# Allegro board Retro0_card_v0.brd
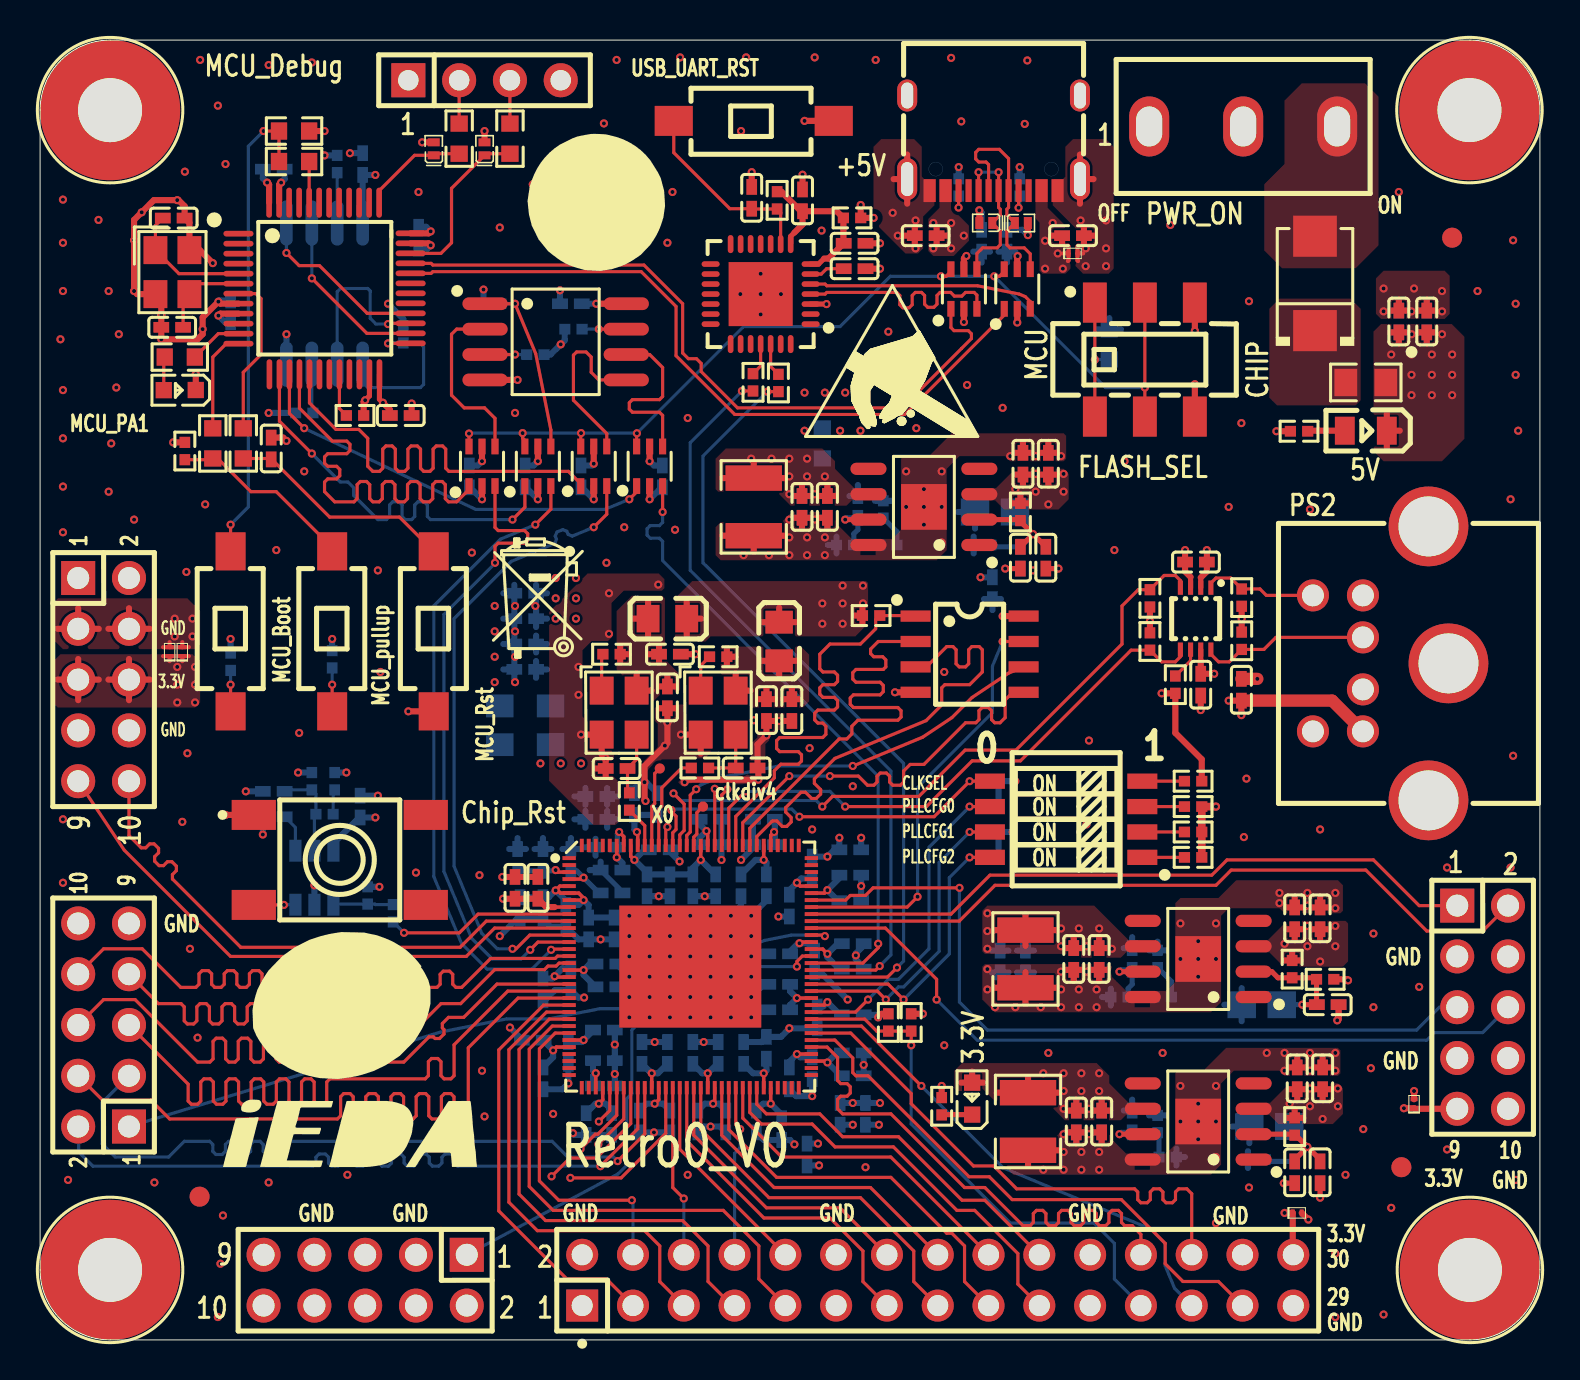
[diagram p0: board, top side]
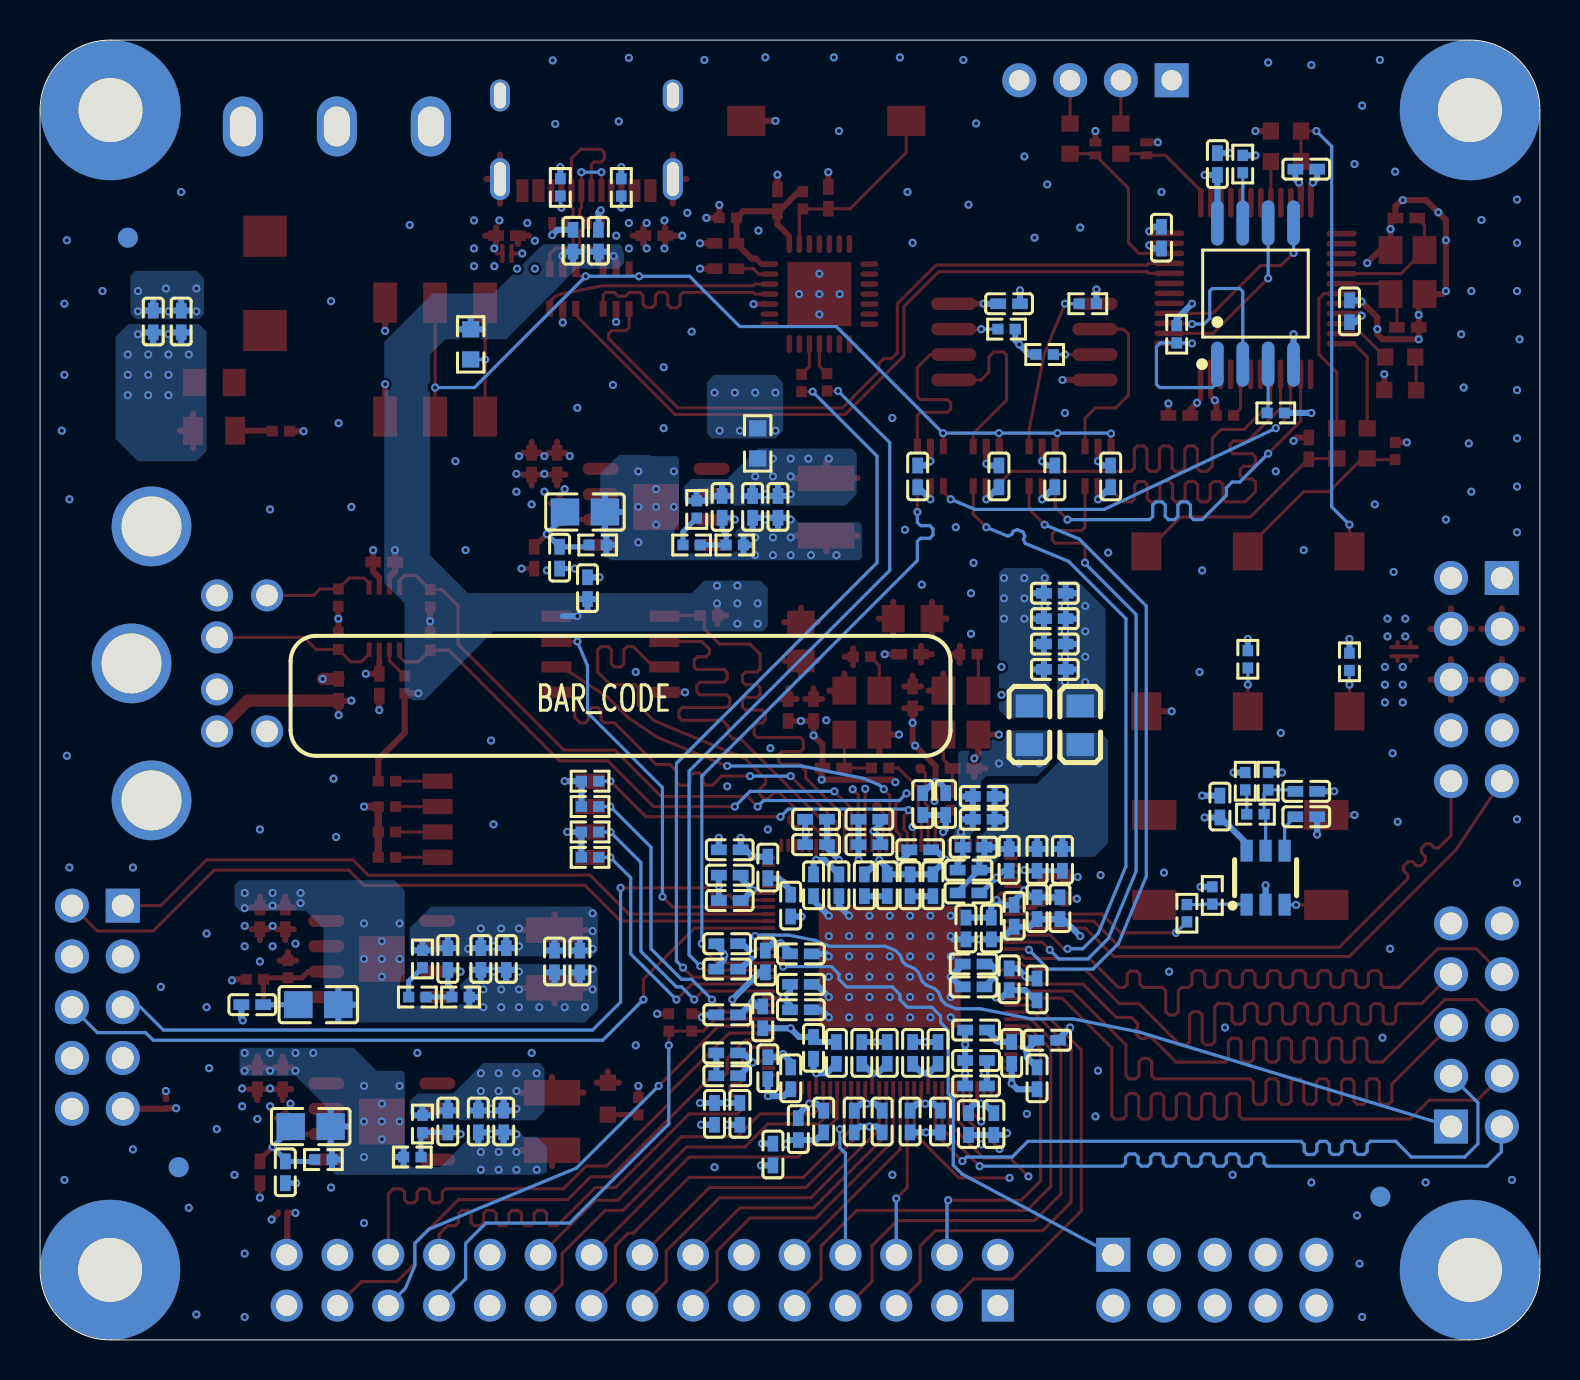
[diagram p1: board, bottom side, seen from below]

Outline 75 x 65 mm; copper layers: TOP, GND02, PWR03, ART04, GND05, BOTTOM. Coordinates in mm from the lower left corner of the outline.
Outline path: 0,61.5 0,3.5 arc(1.03,1.03) 3.5,0 71.5,0 arc(73.98,1.03) 75,3.5 75,61.5 arc(73.98,63.97) 71.5,65 3.5,65 arc(1.03,63.97) 0,61.5

## Design rules (mm)
constraint set DEFAULT: min track width 0.157
net group 3V3_HFP_USB_D: nets 3V3_HFP_USB_DN 3V3_HFP_USB_DP
net group $3N4067: nets $3N4067 EXT_RST_N_I_PAD
net group CUST_I2C: nets CUST_I2C_SCL_IO_PAD CUST_I2C_SDA_IO_PAD
net group CUST_PS2_PS2: nets CUST_PS2_PS2_CLK_I_PAD CUST_PS2_PS2_DAT_I_PAD
net group HFP_SW: nets HFP_SWCLK HFP_SWDIO
net group PS2_5V: nets PS2_CLK_5V PS2_DAT_5V
net group SOC_UD: nets SOC_UD+ SOC_UD-
net group UD: nets UD+ UD-

## Placement (name value [footprint] x y rotation side)
C1  .10  [C0402]  37.59 31.5 270 top
C2  .10  [C0402]  36.32 31.5 270 top
C3  .10  [C0402]  35.33 28.6 0 top
C6  .10  [C0402]  52.96 19.05 90 top
C7  .10  [C0402]  52.96 19.05 90 bottom
C8  .10  [C0402]  51.69 19.05 90 top
C9  .10  [C0402]  51.69 19.05 90 bottom
C10  .10  [C0402]  53.09 10.92 90 bottom
C11  .10  [C0402]  51.82 10.92 90 bottom
C12  .10  [C0402]  53.09 10.92 90 top
C13  .10  [C0402]  51.82 10.92 90 top
C14  .10  [C0402]  62.74 21.08 270 top
C15  .10  [C0402]  64.01 21.08 270 top
C16  .10  [C0402]  62.87 13.08 270 top
C17  .10  [C0402]  64.14 13.08 270 top
C18  .10  [C0402]  51.65 55.22 0 top
C19  .10  [C0402]  69.34 50.93 270 bottom
C20  .10  [C0402]  69.34 50.93 270 top
C21  .10  [C0402]  67.94 50.93 270 top
C22  .10  [C0402]  67.94 50.93 270 bottom
C23  .10  [C0402]  40.73 54.84 0 top
C24  .10  [C0402]  38.13 56.99 90 top
C25  .10  [C0402]  40.73 53.57 0 top
C26  .10  [C0402]  39.37 41.66 90 bottom
C27  .10  [C0402]  39.37 41.66 90 top
C28  .10  [C0402]  38.1 41.66 90 bottom
C29  .10  [C0402]  38.1 41.66 90 top
C30  .10  [C0402]  49.15 43.81 270 top
C31  .10  [C0402]  50.42 43.81 270 top
C32  .10  [C0402]  44.29 55.22 180 top
C33  .10  [C0402]  31.37 32.13 90 top
C34  .10  [C0402]  31.5 34.29 180 top
C35  .10  [C0402]  28.83 28.57 0 top
C48  .10  [C0402]  11.68 26.16 0 bottom
C49  .10  [C0402]  16 26.67 270 bottom
C50  .10  [C0402]  11.68 27.43 0 bottom
C88  .10  [C0402]  18.03 46.23 0 top
C89  .10  [C0402]  6.61 50.64 0 top
C90  .10  [C0402]  6.68 56.1 180 top
C91  .10  [C0402]  18.92 55.12 90 bottom
C93  .10  [C0402]  9.53 51.44 90 bottom
C94  .10  [C0402]  11.68 58.55 0 bottom
C96  .10  [C0402]  11.56 44.58 90 top
C97  .10  [C0402]  16.13 58.8 90 bottom
C102  .10  [C0402]  57.8 38.9 180 top
C103  .10  [C0402]  58.04 32.77 270 top
C115  .10  [C0402]  54.61 19.05 90 bottom
C116  .10  [C0402]  64.39 16.76 0 top
C117  .10  [C0402]  54.61 10.92 90 bottom
C118  .10  [C0402]  62.74 8.38 270 top
C119  .10  [C0402]  40.89 41.66 90 bottom
C120  .10  [C0402]  49.02 39.12 270 bottom
C121  .10  [C0402]  50.29 39.12 270 top
C175  .10  [C0402]  40.01 11.3 90 bottom
C176  .10  [C0402]  41.27 11.3 90 bottom
C177  .10  [C0402]  38.35 9.27 270 bottom
C179  .10  [C0402]  40.64 13.21 180 bottom
C180  .10  [C0402]  36.2 24.77 0 bottom
C181  .10  [C0402]  40.51 23.24 180 bottom
C183  .10  [C0402]  38.86 16.13 90 bottom
C184  .10  [C0402]  35.81 10.92 90 bottom
C185  .10  [C0402]  32.89 10.92 90 bottom
C186  .10  [C0402]  27.3 10.79 90 bottom
C187  .10  [C0402]  33.53 24.77 180 bottom
C188  .10  [C0402]  40.64 18.54 180 bottom
C189  .10  [C0402]  24.64 14.99 0 bottom
C190  .10  [C0402]  31.5 10.92 90 bottom
C192  .10  [C0402]  49.28 18.92 90 bottom
C193  .10  [C0402]  48.01 18.92 90 bottom
C194  .10  [C0402]  40.51 24.51 0 bottom
C195  .10  [C0402]  28.19 12.7 180 bottom
C196  .10  [C0402]  30.1 14.35 270 bottom
C197  .10  [C0402]  25.15 21.59 90 bottom
C198  .10  [C0402]  32.64 22.73 90 bottom
C199  .10  [C0402]  26.29 21.21 90 bottom
C200  .10  [C0402]  26.42 14.35 90 bottom
C201  .10  [C0402]  28.32 18.8 180 bottom
C202  .10  [C0402]  36.32 14.61 270 bottom
C203  .10  [C0402]  27.43 20.57 90 bottom
C204  .10  [C0402]  36.96 19.3 0 bottom
C205  .10  [C0402]  30.99 24.51 180 bottom
C206  .10  [C0402]  36.32 22.73 90 bottom
C247  .10  [C0402]  28.32 24.64 0 bottom
C248  .10  [C0402]  24.26 37.34 0 bottom
C249  .10  [C0402]  25.15 24 270 bottom
C250  .10  [C0402]  26.54 24 270 bottom
C254  .10  [C0402]  60.07 32.51 270 top
C258  .10  [C0402]  48.35 54.97 90 bottom
C259  .10  [C0402]  47.08 54.97 90 bottom
C260  .10  [C0402]  27.05 43.18 270 bottom
C261  .10  [C0402]  21.46 43.18 270 bottom
C264  .10  [C0402]  31.11 43.18 270 bottom
C265  .10  [C0402]  24.26 43.18 270 bottom
C283  .10  [C0402]  64.39 16.76 0 bottom
C285  .10  [C0402]  49.02 39.12 270 top
C286  .10  [C0402]  24.26 34.8 0 bottom
C288  .10  [C0402]  62.74 8.38 270 bottom
C289  .10  [C0402]  64.01 8.38 270 top
C290  .10  [C0805]  61.09 16.76 0 bottom
C291  .10  [C0805]  61.47 10.67 0 bottom
C293  .10  [C0805]  47.75 41.4 0 bottom
C297  .10  [C0402]  37.47 13.08 90 bottom
C300  .10  [C0402]  24.26 33.53 0 bottom
C301  .10  [C0402]  26.54 18.03 90 bottom
C302  .10  [C0402]  24.89 22.61 270 top
C303  .10  [C0402]  29.72 26.8 270 bottom
C315  .10  [C0402]  35.59 57.11 90 top
C317  .10  [C0402]  31.5 22.73 90 bottom
C318  .10  [C0402]  36.96 16.51 0 bottom
C319  .10  [C0402]  35.05 22.73 90 bottom
C320  .10  [C0402]  38.61 23.62 270 bottom
C321  .10  [C0402]  35.18 14.35 270 bottom
C322  .10  [C0402]  33.91 14.35 270 bottom
C323  .10  [C0402]  31.37 14.35 270 bottom
C324  .10  [C0402]  28.19 15.49 180 bottom
C325  .10  [C0402]  28.32 17.65 180 bottom
C326  .10  [C0402]  24 21.59 90 bottom
C327  .10  [C0402]  30.35 22.73 90 bottom
C328  .10  [C0402]  28.7 20.57 90 bottom
C329  .10  [C0402]  33.78 22.73 90 bottom
C339  .10  [C0402]  23.75 22.61 270 top
C340  .10  [C0402]  25.15 13.08 90 bottom
C341  .10  [C0402]  37.08 10.54 90 bottom
C342  .10  [C0402]  36.2 26.04 0 bottom
C343  .10  [C0402]  40.64 19.81 180 bottom
C344  .10  [C0402]  40.51 21.97 180 bottom
C345  .10  [C0402]  25.15 17.53 90 bottom
C346  .10  [C0402]  28.57 10.79 90 bottom
C347  .10  [C0402]  34.29 10.92 90 bottom
C348  .10  [C0402]  26.54 51.82 180 bottom
C349  .10  [C0402]  47.62 37.59 90 bottom
C350  .10  [C0402]  28.19 13.97 180 bottom
C351  .10  [C0402]  38.61 13.59 90 bottom
C352  .10  [C0402]  36.96 17.78 0 bottom
C353  .10  [C0402]  32.64 14.35 270 bottom
C354  .10  [C0402]  38.73 18.92 90 bottom
C355  .10  [C0402]  37.47 21.72 90 bottom
C356  .10  [C0402]  40.64 14.35 180 bottom
C357  .10  [C0402]  33.53 26.04 180 bottom
C358  .10  [C0402]  40.64 16.26 180 bottom
C359  .10  [C0402]  30.86 26.8 270 bottom
C360  .10  [C0402]  29.97 10.92 90 bottom
C361  .10  [C0402]  28.57 22.35 180 bottom
C362  .10  [C0402]  28.57 23.5 0 bottom
C363  .10  [C0402]  27.81 26.04 0 bottom
C364  .10  [C0402]  23.88 24 270 bottom
C365  .10  [C0402]  27.81 27.18 0 bottom
C366  .10  [C0402]  24.26 36.07 0 bottom
D1  .10  [SMB_L4_6-W3_6-LS5_3-RD]  63.75 52.83 90 top
D4  .10  [X1SON-2_L1_0-W0_6-P0_65-RD]  47.29 55.85 180 top
D5  .10  [X1SON-2_L1_0-W0_6-P0_65-RD]  49.07 55.85 0 top
D6  .10  [X2SON-2_L0_6-W0_3-P0_35]  51.65 54.33 0 top
D7  .10  [X1SON-2_L1_0-W0_6-P0_65-RD]  22.23 59.56 90 top
D8  .10  [X1SON-2_L1_0-W0_6-P0_65-RD]  19.68 59.56 90 top
D9  .10  [X2SON-2_L0_6-W0_3-P0_35]  62.87 6.35 0 top
D10  .10  [X2SON-2_L0_6-W0_3-P0_35]  6.48 34.42 90 top
D11  .10  [X2SON-2_L0_6-W0_3-P0_35]  68.71 11.81 90 top
D12  .10  [X2SON-2_L0_6-W0_3-P0_35]  7.11 34.42 90 top
F1  .10  [R0805]  66.29 47.88 0 top
H1  -  [HDR-TH_4P-P2_54-V-F]  22.23 62.99 0 top
H55  -  [HDR-TH_30P-P2_54-V-M-R2-C15-S2_54-BL]  44.89 2.99 0 top
L1  .10  [L0805]  36.96 34.92 270 top
L2  .10  [L0805]  31.37 36.07 180 top
L13  .10  [L0805]  25.53 30.73 270 bottom
L14  .10  [L0805]  22.99 30.73 270 bottom
LED1  .10  [LED0603-RD]  46.61 12.06 90 top
LED4  .10  [LED0603-RD-YELLOW]  6.99 47.5 180 top
LED15  .10  [LED0805-R-RD]  66.29 45.47 180 top
MARK1  -  [MARK-POINT-1MM]  7.98 7.16 0 top
MARK2  -  [MARK-POINT-1MM]  70.61 55.12 0 top
MARK3  -  [MARK-POINT-1MM]  68.07 8.64 0 top
MARK4  -  [MARK-POINT-1MM]  7.98 7.16 180 bottom
MARK5  -  [MARK-POINT-1MM]  70.61 55.12 180 bottom
MARK6  -  [MARK-POINT-1MM]  68.07 8.64 180 bottom
NOREF  -  []  23.62 -4.45 0 top
NOREF#2  -  []  49.86 -22.25 0 top
NOREF#3  -  []  0 61.5 0 top
NOREF#4  -  []  42.42 48.26 0 top
NOREF#5  -  []  271.12 -27.46 0 top
NOREF#6  -  []  131.83 -24.38 0 top
NOREF#7  -  []  27.43 37.21 0 top
NOREF#8  -  []  14.48 10.29 0 top
NOREF#9  -  []  24.38 53.47 0 top
NOREF#10  -  []  3.5 0 90 top
NOREF#11  -  []  14.99 16.76 0 top
NOREF#12  -  []  46.48 32.13 0 bottom
OSC1  -  [OSC-SMD_4P-L3_2-W2_5-BL]  28.96 31.37 270 top
PS1  -  [CONN-TH_DS1093-01-PN60]  67.04 33.83 90 top
R1  .10  [R0402]  33.91 34.16 180 top
R2  .10  [R0402]  32.99 28.6 180 top
R3  .10  [R0402]  29.46 26.92 270 top
R4  .10  [R0402]  28.57 34.29 180 top
R7  .10  [R0402]  60.83 9.02 180 bottom
R8  .10  [R0402]  55.88 10.79 270 bottom
R9  .10  [R0402]  64.26 18.03 0 top
R10  .10  [R0402]  62.74 10.67 270 top
R12  .10  [R0402]  53.98 17.14 180 bottom
R13  .10  [R0402]  56.39 9.14 0 bottom
R14  .10  [R0402]  36.92 47.85 270 top
R15  .10  [R0402]  35.65 47.89 270 top
R16  .10  [R0402]  47.12 39.75 180 bottom
R17  .10  [R0402]  42.42 39.75 180 bottom
R18  .10  [R0402]  45.94 57.63 90 bottom
R19  .10  [R0402]  49.02 41.4 270 top
R20  .10  [R0402]  40.26 39.75 180 bottom
R21  .10  [R0402]  48.99 57.63 90 bottom
R22  .10  [R0402]  45.09 11.68 270 top
R23  .10  [R1210]  49.28 19.05 90 top
R24  .10  [R0402]  40.6 56.11 180 top
R25  .10  [R0402]  36.86 56.99 270 top
R26  .10  [R0402]  57.66 24.13 0 top
R27  .10  [R0402]  57.66 25.4 0 top
R29  .10  [R0402]  57.66 26.67 0 top
R30  .10  [R0402]  57.66 27.94 0 top
R37  .10  [R0402]  14.73 27.94 270 bottom
R38  .10  [R0402]  16.38 22.23 90 bottom
R39  .10  [R0402]  13.59 27.94 90 bottom
R40  .10  [R0402]  17.65 21.34 90 bottom
R153  .10  [R0603]  6.99 49.15 0 top
R154  .10  [R0402]  15.75 46.23 180 top
R157  .10  [R0603]  12.7 60.45 180 top
R158  .10  [R0603]  8.64 44.83 90 top
R160  .10  [R0603]  53.47 49.78 270 bottom
R168  .10  [R0402]  56.77 32.77 90 top
R182  .10  [R0402]  56.13 17.14 180 bottom
R183  .10  [R0402]  55.88 19.05 90 bottom
R184  .10  [R0402]  62.61 18.54 270 top
R185  .10  [R0402]  42.16 41.53 90 bottom
R191  .10  [R1210]  49.4 10.92 90 top
R193  .10  [R1210]  35.69 41.66 90 top
R230  .10  [R0402]  47.5 24.13 0 bottom
R231  .10  [R0402]  47.5 25.4 0 bottom
R232  .10  [R0402]  47.5 26.67 0 bottom
R233  .10  [R0402]  47.5 27.94 0 bottom
R234  .10  [R0402]  62.96 45.44 0 top
R245  .10  [R0402]  13.21 46.35 0 bottom
R246  .10  [R0402]  14.86 58.8 90 bottom
R247  .10  [R0603]  20.95 60.07 90 top
R248  .10  [R0603]  10.16 44.83 270 top
R249  .10  [R0603]  23.5 60.07 90 top
R250  .10  [R0603]  12.7 58.93 180 top
R252  .10  [R0402]  9.53 33.91 90 bottom
R253  .10  [R0402]  14.61 34.04 90 bottom
R287  .10  [R0402]  42.42 15.88 270 top
R334  .10  [R0603]  39.12 44.83 90 bottom
R335  .10  [R0402]  55.5 37.08 90 top
R336  .10  [R0402]  55.5 34.92 270 top
R337  .10  [R0402]  60.09 37.12 270 top
R338  .10  [R0402]  60.09 34.96 90 top
R351  .10  [R0402]  18.16 50.29 270 bottom
R354  .10  [R0402]  7.24 44.45 90 top
R357  .10  [R0402]  24.77 49.28 180 bottom
R358  .10  [R0402]  26.67 50.55 180 bottom
R359  .10  [R0402]  22.61 51.82 0 bottom
R362  .10  [R0402]  41.56 36.22 0 top
R363  .10  [R0402]  14.22 26.29 0 bottom
R364  .10  [R0402]  43.56 15.88 270 top
SCREW1  -  [M3__]  3.5 61.5 0 top
SCREW2  -  [M3__]  71.48 61.5 0 top
SCREW3  -  [M3__]  71.5 3.5 0 top
SCREW4  -  [M3__]  3.5 3.5 0 top
SW3  -  [KEY-SMD_4P-L6_0-W6_0-P4_50-LS8_5]  14.99 24 0 top
SW9  -  [SW-TH_SS-12D10L5]  60.16 60.68 0 top
SW14  .10  [SW-SMD_L6_0-W3_3-LS8_0]  9.53 35.43 270 top
SW15  .10  [SW-SMD_L6_0-W3_3-LS8_0]  19.68 35.43 270 top
SW16  .10  [SW-SMD_L6_0-W3_3-LS8_0]  14.61 35.43 270 top
SW17  -  [SW-SMD_MST22D18G2]  55.24 49.02 0 top
SW22  .10  [SW-SMD_L6_0-W3_3-LS8_0]  35.69 60.96 0 top
SW23  -  [SW-SMD_8P-L6_7-W5_4-P1_27-LS8_5]  51.31 26.04 90 top
TP1  -  [TEST-POINT-0_5MM]  33.15 26.67 0 top
TP2  -  [TEST-POINT-0_5MM]  30.99 28.57 0 top
U2  -  [VSON8_L2_0-W2_3-P0_50-LS3_1-BL]  57.78 36.07 180 top
U3  -  [SOT-23-6_L2_9-W1_6-P0_95-LS2_8-BR]  13.72 23.11 270 bottom
U7  -  [SOP-8_L4_9-W3_9-P1_27-LS6_0-BL-EP]  57.91 19.05 90 top
U8  -  [SOP-8_L4_9-W3_9-P1_27-LS6_0-BL-EP]  57.91 10.92 90 top
U9  -  [WQFN-28_L5_0-W5_0-P0_50-BL-EP3_2]  36.03 52.3 90 top
U10  -  [SOP-8_L4_9-W3_9-P1_27-LS6_0-BL-EP]  44.2 41.66 90 top
U17  -  [LQFP-48_48P-L7_0-W7_0-P0_50-LS9_0-BL]  14.22 52.58 270 top
U18  -  [SOIC-8_L5_3-W5_3-P1_27-LS8_0-BL]  14.22 52.32 180 bottom
U19  -  [SOT-363_L2_0-W1_3-P0_65-LS2_1-BL]  24.89 43.69 0 top
U20  -  [SOT-363_L2_0-W1_3-P0_65-LS2_1-BL]  30.48 43.69 0 top
U21  -  [SOT-363_L2_0-W1_3-P0_65-LS2_1-BL]  22.1 43.69 0 top
U22  -  [SOT-363_L2_0-W1_3-P0_65-LS2_1-BL]  27.69 43.69 0 top
U24  -  [SOT-363_L2_0-W1_3-P0_65-LS2_1-BL]  46.2 52.55 0 top
U25  -  [SOT-363_L2_0-W1_3-P0_65-LS2_1-BL]  48.86 52.55 0 top
U43  -  [QFN-128_L12_3-W12_3-P0_35-TL-EP7_0-1]  32.51 18.67 0 top
U46  -  [HDR-TH_10P-P2_54-V-M-R2-C5-S2_54]  3.17 33.02 270 top
U54  -  [SOIC-8_L5_3-W5_3-P1_27-LS8_0-BL]  25.78 49.91 270 top
U56  -  [SOP-8_L4_9-W3_9-P1_27-LS6_0-BL-2]  46.48 34.29 270 top
U57  -  [HDR-TH_10P-P2_54-V-M-R2-C5-S2_54]  16.26 2.99 180 top
U58  -  [HDR-TH_10P-P2_54-V-M-R2-C5-S2_54]  72.14 16.64 270 top
U59  -  [HDR-TH_10P-P2_54-V-M-R2-C5-S2_54]  3.17 15.75 90 top
UART1  -  [USB-C-SMD_G-SWITCH_GT-USB-7010EN]  47.68 59.85 180 top
X1  -  [OSC-SMD_4P-L3_2-W2_5-BL1]  33.91 31.37 270 top
X2  -  [CRYSTAL-SMD_4P-L3_2-W2_5-BL]  6.62 53.4 270 top

## Library data of the parts
C1 C2 C6 C7 C10 C11 C21 C22 C26 C27 C33 C34 C116 C118 C179-C181 C195-C197 C248 C249 C283 C288 C289 C355 = CL05B104KB54PNC
C3 C35 = GJM1555C1H150FB01D
C8 C9 C12 C13 C15 C17-C20 C28 C29 C31 C32 C121 C175-C177 C192-C194 C300 C317-C329 C339-C347 C350-C352 C356-C362 C364-C366 = HGC0402R5106M100NTEJ
C14 C16 C23 C30 C247 = CL05A105KA5NQNC
C24 C25 C49 C88 C91 C93 C94 = CC0402KRX7R7BB104
C48 = GRM155R71H223KA12D
C50 = CC0402KRX7R9BB103
C89 C90 = GRM1555C1H120JA01D
C96 C97 C102 C103 C254 C258-C261 C264 C265 C315 C348 C349 = CL05B104KO5NNNC
C115 C117 C119 = GRM1555C1H102JA01D
C120 C285 = GRM155R71H104KE14D
C183-C186 C198-C201 C250 C286 C353 C363 = GRM155C61E475ME15D
C187 C188 C202 C203 = GRT155R6YA105KE13D
C189 C190 C204-C206 C301 C302 C354 = GCM1555G1H102JA16D
C290 C291 = CL21A106KAYNNNE_C15850
C293 = GRM21BR61H106KE43L
C297 C303 = GRM155R61H474KE11D
D1 = VS-20BQ030-M3_5BT
D4 D5 D7 D8 = ESD321DPYR_C2868952
D6 D9-D12 = ESD441DPLR
F1 = SMD0805-100-12
H1 = 2_54-1_4P_
H55 = X6521WV-2X15H-C60D30
L1 L2 L13 L14 = CBW201209U601T
LED1 = KT-0603R
LED4 = 19-213_Y2C-CQ2R2L_3T_CY_
LED15 = NCD0805R1
MARK1-MARK6 = MARK-POINT
OSC1 = OT2EL4C4JI-111OLP-12_288M
PS1 = DS1093-01-PN60
R1 R4 R22 R25 R168 R234 R245 R246 R335-R338 R351 R354 R357-R359 R362 R364 = 0402WGF4701TCE
R2 R3 = 0402WGF330JTCE
R7 R9 R16 = RC0402FR-071KL
R8 R17 = RC0402FR-0756KL
R10 R19 R184 = RC0402FR-072K49L
R12 R13 R20 R38 R39 R154 R182 R230-R233 = 0402WGF1002TCE
R14 R15 R24 = 0402WGF0000TCE
R18 R21 = 0402WGF5101TCE
R23 R191 R193 = RC1210FR-07100RL
R26 R27 R29 R30 = 0402WGF1500TCE
R37 = RC0402FR-0757K6P
R40 = 0402WGF0000TCE: signal model: 0402WGF0000TCE_.10
R153 R160 = 0603WAF4701T5E
R157 = 0603WAF1002T5E
R158 = 0603WAF3300T5E
R183 = 0402WGF4021TCE
R185 = RC0402FR-070RL
R247-R250 R334 = 0603WAF0000T5E
R252 R253 R287 = 0402WGF1001TCE
R363 = RT0402BRD0720KL
SCREW1-SCREW4 = M3__
SW3 = TS-KG02S-AT50F
SW9 = SS-12D10L5
SW14-SW16 SW22 = TS-1101-C-W
SW17 = MST22D18G2_125
SW23 = DSHP04TS-S
TP1 TP2 = TEST-POINT
U2 = TXS0102DCUR
U3 = TPS3808G01DBVR
U7 U8 U10 = RT2515HGSP
U9 = CP2102-GMR
U17 = CH32V103C8T6
U18 U54 = W25Q128JVSIQ_C113767
U19-U22 U24 U25 = WAS3157B-6_TR
U43 = RETRO0
U46 U57-U59 = ZX-PZ2_54-2-5PZZ
U56 = ESP-PSRAM64H
UART1 = HC-TYPE-C-16P-01A-R
X1 = OT2EL4C4JI-111OLP-24M
X2 = X32258MOB4SI

## Footprints (pads in the part's own frame, mm; a bottom-side part is the same pattern mirrored in y, then rotated)
C0402
  rect 0.787x0.533 smd: 1(-0.545,0) 2(0.545,0)
C0805
  rect 1.422x1.346 smd: 1(-1,0) 2(1,0)
CONN-TH_DS1093-01-PN60
  round 1.6 hole 1.092: 1(1.301,0.888) 2(-1.3,0.888) 3(3.4,0.888) 4(-3.4,0.888) 5(3.4,3.388) 6(-3.4,3.388)
  round 3.988 hole 2.997: 7(0,-3.388) 8(-6.85,-2.39) 9(6.85,-2.39)
CRYSTAL-SMD_4P-L3_2-W2_5-BL
  rect 1.397x1.194 smd: 1(-1.1,-0.85) 2(1.1,-0.85) 3(1.1,0.85) 4(-1.1,0.85)
HDR-TH_4P-P2_54-V-F
  rect 1.702x1.702 hole 1.02: 1(-3.81,0)
  round 1.702 hole 1.02: 2(-1.27,0) 3(1.27,0) 4(3.81,0)
HDR-TH_10P-P2_54-V-M-R2-C5-S2_54
  rect 1.7x1.7 hole 1.1: 1(-5.08,-1.27)
  round 1.7 hole 1.1: 2(-5.08,1.27) 3(-2.54,-1.27) 4(-2.54,1.27) 5(0,-1.27) 6(0,1.27) 7(2.54,-1.27) 8(2.54,1.27) 9(5.08,-1.27) 10(5.08,1.27)
HDR-TH_30P-P2_54-V-M-R2-C15-S2_54-BL
  rect 1.6x1.6 hole 1.05: 1(-17.78,-1.27)
  round 1.6 hole 1.05: 2(-17.78,1.27) 3(-15.24,-1.27) 4(-15.24,1.27) 5(-12.7,-1.27) 6(-12.7,1.27) 7(-10.16,-1.27) 8(-10.16,1.27) 9(-7.62,-1.27) 10(-7.62,1.27) 11(-5.08,-1.27) 12(-5.08,1.27) 13(-2.54,-1.27) 14(-2.54,1.27) 15(0,-1.27) 16(0,1.27) 17(2.54,-1.27) 18(2.54,1.27) 19(5.08,-1.27) 20(5.08,1.27) 21(7.62,-1.27) 22(7.62,1.27) 23(10.16,-1.27) 24(10.16,1.27) 25(12.7,-1.27) 26(12.7,1.27) 27(15.24,-1.27) 28(15.24,1.27) 29(17.78,-1.27) 30(17.78,1.27)
KEY-SMD_4P-L6_0-W6_0-P4_50-LS8_5
  rect 2.21x1.499 smd: 1(-4.3,2.25) 2(4.3,2.25) 3(-4.3,-2.25) 4(4.3,-2.25)
L0805
  rect 1.143x1.372 smd: 1(-0.966,0) 2(0.966,0)
LED0603-RD
  rect 0.813x0.813 smd: 1(-0.8,0) 2(0.8,0)
LED0603-RD-YELLOW
  rect 0.813x0.813 smd: 1(-0.8,-0.004) 2(0.8,0.004)
LED0805-R-RD
  rect 0.991x1.397 smd: 1(1.05,0) 2(-1.05,0)
LQFP-48_48P-L7_0-W7_0-P0_50-LS9_0-BL
  oval 0.279x1.499 smd: 1(-2.743,-4.305) 2(-2.243,-4.305) 3(-1.742,-4.305) 4(-1.242,-4.305) 5(-0.742,-4.305) 6(-0.241,-4.305) 7(0.257,-4.305) 8(0.757,-4.305) 9(1.257,-4.305) 10(1.758,-4.305) 11(2.258,-4.305) 12(2.758,-4.305) 25(2.743,4.305) 26(2.243,4.305) 27(1.742,4.305) 28(1.242,4.305) 29(0.742,4.305) 30(0.241,4.305) 31(-0.257,4.305) 32(-0.757,4.305) 33(-1.257,4.305) 34(-1.758,4.305) 35(-2.258,4.305) 36(-2.758,4.305)
  oval 1.499x0.279 smd: 13(4.293,-2.756) 14(4.293,-2.256) 15(4.293,-1.755) 16(4.293,-1.255) 17(4.293,-0.754) 18(4.293,-0.254) 19(4.293,0.244) 20(4.293,0.744) 21(4.293,1.245) 22(4.293,1.745) 23(4.293,2.245) 24(4.293,2.746) 37(-4.293,2.731) 38(-4.293,2.23) 39(-4.293,1.73) 40(-4.293,1.229) 41(-4.293,0.729) 42(-4.293,0.229) 43(-4.293,-0.269) 44(-4.293,-0.77) 45(-4.293,-1.27) 46(-4.293,-1.77) 47(-4.293,-2.271) 48(-4.293,-2.771)
M3__
  round 7.01 hole 3.2: 1(0,0)
MARK-POINT-1MM
  round 1 smd: 1(0,0)
OSC-SMD_4P-L3_2-W2_5-BL
  rect 1.397x1.194 smd: 1(-1.1,-0.875) 2(1.1,-0.875) 3(1.1,0.875) 4(-1.1,0.875)
OSC-SMD_4P-L3_2-W2_5-BL1
  rect 1.397x1.194 smd: 1(-1.1,-0.875) 2(1.1,-0.875) 3(1.1,0.875) 4(-1.1,0.875)
QFN-128_L12_3-W12_3-P0_35-TL-EP7_0-1
  rect 0.665x0.196 smd: 1(-6.057,5.425) 2(-6.057,5.075) 3(-6.057,4.725) 4(-6.057,4.375) 5(-6.057,4.025) 6(-6.057,3.675) 7(-6.057,3.325) 8(-6.057,2.975) 9(-6.057,2.625) 10(-6.057,2.275) 11(-6.057,1.925) 12(-6.057,1.575) 13(-6.057,1.225) 14(-6.057,0.875) 15(-6.057,0.525) 16(-6.057,0.175) 17(-6.057,-0.175) 18(-6.057,-0.525) 19(-6.057,-0.875) 20(-6.057,-1.225) 21(-6.057,-1.575) 22(-6.057,-1.925) 23(-6.057,-2.275) 24(-6.057,-2.625) 25(-6.057,-2.975) 26(-6.057,-3.325) 27(-6.057,-3.675) 28(-6.057,-4.025) 29(-6.057,-4.375) 30(-6.057,-4.725) 31(-6.057,-5.075) 32(-6.057,-5.425) 65(6.058,-5.425) 66(6.058,-5.075) 67(6.058,-4.725) 68(6.058,-4.375) 69(6.058,-4.025) 70(6.058,-3.675) 71(6.058,-3.325) 72(6.058,-2.975) 73(6.058,-2.625) 74(6.058,-2.275) 75(6.058,-1.925) 76(6.058,-1.575) 77(6.058,-1.225) 78(6.058,-0.875) 79(6.058,-0.525) 80(6.058,-0.175) 81(6.058,0.175) 82(6.058,0.525) 83(6.058,0.875) 84(6.058,1.225) 85(6.058,1.575) 86(6.058,1.925) 87(6.058,2.275) 88(6.058,2.625) 89(6.058,2.975) 90(6.058,3.325) 91(6.058,3.675) 92(6.058,4.025) 93(6.058,4.375) 94(6.058,4.725) 95(6.058,5.075) 96(6.058,5.425)
  rect 0.196x0.665 smd: 33(-5.425,-6.057) 34(-5.075,-6.057) 35(-4.725,-6.057) 36(-4.375,-6.057) 37(-4.025,-6.057) 38(-3.675,-6.057) 39(-3.325,-6.057) 40(-2.975,-6.057) 41(-2.625,-6.057) 42(-2.275,-6.057) 43(-1.925,-6.057) 44(-1.575,-6.057) 45(-1.225,-6.057) 46(-0.875,-6.057) 47(-0.525,-6.057) 48(-0.175,-6.057) 49(0.175,-6.057) 50(0.525,-6.057) 51(0.875,-6.057) 52(1.225,-6.057) 53(1.575,-6.057) 54(1.925,-6.057) 55(2.275,-6.057) 56(2.625,-6.057) 57(2.975,-6.057) 58(3.325,-6.057) 59(3.675,-6.057) 60(4.025,-6.057) 61(4.375,-6.057) 62(4.725,-6.057) 63(5.075,-6.057) 64(5.425,-6.057) 97(5.425,6.057) 98(5.075,6.057) 99(4.725,6.057) 100(4.375,6.057) 101(4.025,6.057) 102(3.675,6.057) 103(3.325,6.057) 104(2.975,6.057) 105(2.625,6.057) 106(2.275,6.057) 107(1.925,6.057) 108(1.575,6.057) 109(1.225,6.057) 110(0.875,6.057) 111(0.525,6.057) 112(0.175,6.057) 113(-0.175,6.057) 114(-0.525,6.057) 115(-0.875,6.057) 116(-1.225,6.057) 117(-1.575,6.057) 118(-1.925,6.057) 119(-2.275,6.057) 120(-2.625,6.057) 121(-2.975,6.057) 122(-3.325,6.057) 123(-3.675,6.057) 124(-4.025,6.057) 125(-4.375,6.057) 126(-4.725,6.057) 127(-5.075,6.057) 128(-5.425,6.057)
  rect 7.1x6.1 smd: 129(0,0)
R0402
  rect 0.559x0.533 smd: 1(-0.433,0) 2(0.433,0)
R0603
  rect 0.813x0.864 smd: 1(-0.753,0) 2(0.753,0)
R0805
  rect 1.143x1.372 smd: 1(-1,0) 2(1,0)
R1210
  rect 1.27x2.819 smd: 1(-1.441,0) 2(1.441,0)
SMB_L4_6-W3_6-LS5_3-RD
  rect 2.057x2.184 smd: 1(-2.361,0) 2(2.361,0)
SOIC-8_L5_3-W5_3-P1_27-LS8_0-BL
  oval 0.635x2.261 smd: 1(-1.905,-3.53) 2(-0.635,-3.53) 3(0.635,-3.53) 4(1.905,-3.53) 5(1.905,3.53) 6(0.635,3.53) 7(-0.635,3.53) 8(-1.905,3.53)
SOP-8_L4_9-W3_9-P1_27-LS6_0-BL-2
  rect 0.56x1.5 smd: 1(-1.905,-2.701) 2(-0.635,-2.701) 3(0.635,-2.701) 4(1.905,-2.7) 5(1.905,2.7) 6(0.635,2.7) 7(-0.635,2.7) 8(-1.905,2.7)
SOP-8_L4_9-W3_9-P1_27-LS6_0-BL-EP
  oval 0.61x1.803 smd: 1(-1.905,-2.772) 2(-0.635,-2.772) 3(0.635,-2.772) 4(1.905,-2.772) 5(1.905,2.772) 6(0.635,2.772) 7(-0.635,2.772) 8(-1.905,2.772)
  rect 2.286x2.286 smd: 9(0,0)
SOT-23-6_L2_9-W1_6-P0_95-LS2_8-BR
  rect 1.092x0.61 smd: 1(1.35,-0.95) 2(1.35,0) 3(1.35,0.95) 4(-1.35,0.95) 5(-1.35,0) 6(-1.35,-0.95)
SOT-363_L2_0-W1_3-P0_65-LS2_1-BL
  rect 0.356x0.787 smd: 1(-0.65,-0.99) 2(0,-0.99) 3(0.65,-0.99) 4(0.65,0.99) 5(0,0.99) 6(-0.65,0.99)
SW-SMD_8P-L6_7-W5_4-P1_27-LS8_5
  rect 0.762x1.499 smd: 1(-1.905,-3.81) 2(-0.635,-3.81) 3(0.635,-3.81) 4(1.905,-3.81) 5(1.905,3.81) 6(0.635,3.81) 7(-0.635,3.81) 8(-1.905,3.81)
SW-SMD_L6_0-W3_3-LS8_0
  rect 1.905x1.499 smd: 1(-4,0) 2(4,0)
SW-SMD_MST22D18G2
  rect 1.194x2.007 smd: 1(-2.5,2.85) 2(0,2.85) 3(2.5,2.85) 4(-2.5,-2.85) 5(0,-2.85) 6(2.5,-2.85)
SW-TH_SS-12D10L5
  oval 2x3 hole 1.3x2: 1(-4.7,0) 2(0,0) 3(4.7,0)
TEST-POINT-0_5MM
  round 0.508 smd: 1(0,0)
USB-C-SMD_G-SWITCH_GT-USB-7010EN
  oval 1x2.1 hole 0.6x1.7: 1(-4.32,1.803) 2(4.32,1.803)
  oval 1x1.6 hole 0.6x1.3: 3(4.32,-2.378) 4(-4.32,-2.378)
  rect 0.61x1.143 smd: A1B12(-3.2,2.378) A4B9(-2.4,2.378) B1A12(3.2,2.378) B4A9(2.4,2.378)
  rect 0.305x1.143 smd: A5(-1.25,2.378) A6(-0.25,2.378) A7(0.25,2.378) A8(1.25,2.378) B5(1.75,2.378) B6(0.75,2.378) B7(-0.75,2.378) B8(-1.75,2.378)
VSON8_L2_0-W2_3-P0_50-LS3_1-BL
  rect 0.254x0.711 smd: 1(-0.762,-1.55) 2(-0.254,-1.55) 3(0.254,-1.55) 4(0.762,-1.55) 5(0.762,1.55) 6(0.254,1.55) 7(-0.254,1.55) 8(-0.762,1.55)
WQFN-28_L5_0-W5_0-P0_50-BL-EP3_2
  oval 0.28x0.9 smd: 1(-1.501,-2.5) 2(-1.001,-2.5) 3(-0.5,-2.5) 4(0,-2.5) 5(0.5,-2.5) 6(1.001,-2.5) 7(1.501,-2.5) 15(1.501,2.5) 16(1.001,2.5) 17(0.5,2.5) 18(0,2.5) 19(-0.5,2.5) 20(-1.001,2.5) 21(-1.501,2.5)
  oval 0.9x0.28 smd: 8(2.5,-1.501) 9(2.5,-1.001) 10(2.5,-0.5) 11(2.5,0) 12(2.5,0.5) 13(2.5,1.001) 14(2.5,1.501) 22(-2.5,1.501) 23(-2.5,1.001) 24(-2.5,0.5) 25(-2.5,0) 26(-2.5,-0.5) 27(-2.5,-1.001) 28(-2.5,-1.501)
  rect 3.2x3.2 smd: 29(0,0)
X1SON-2_L1_0-W0_6-P0_65-RD
  rect 0.4x0.6 smd: 1(-0.325,0) 2(0.325,0)
X2SON-2_L0_6-W0_3-P0_35
  rect 0.2x0.35 smd: 1(-0.225,0) 2(0.225,0)

## Nets
3V3_HFP_SPI1_CLK: U17.15 U20.1
3V3_HFP_SPI1_CS: U17.14 U19.1
3V3_HFP_SPI1_MISO: U17.16 U21.1
3V3_HFP_SPI1_MOSI: U17.17 U22.1
3V3_HFP_SPI2_CLK: U17.26 U18.6
3V3_HFP_SPI2_CS: R351.2 U17.25 U18.1
3V3_HFP_SPI2_MISO: U17.27 U18.2
3V3_HFP_SPI2_MOSI: U17.28 U18.5
3V3_HFP_USB_DN: U17.32 U25.1
3V3_HFP_USB_DP: U17.33 U24.1
GND: C1.2 C2.2 C3.2 C6.1 C7.1 C8.1 C9.1 C10.1 C11.1 C12.1 C13.1 C14.1 C15.1 C16.1 C17.1 C18.2 C19.1 C20.1 C21.1 C22.1 C23.2 C24.2 C25.2 C26.1 C27.1 C28.1 C29.1 C30.1 C31.1 C32.2 C33.1 C34.1 C35.1 C48.1 C49.1 C50.1 C88.2 C89.1 C90.1 C91.1 C93.2 C94.2 C96.2 C97.2 C102.1 C103.2 C116.2 C118.2 C120.2 C121.2 C175.1 C176.1 C177.1 C179.1 C180.1 C181.1 C183.1 C184.1 C185.1 C186.1 C187.1 C188.1 C189.1 C190.1 C192.1 C193.1 C194.1 C195.1 C196.1 C197.1 C198.1 C199.1 C200.1 C201.1 C202.1 C203.1 C204.1 C205.1 C206.1 C248.1 C254.1 C258.2 C259.2 C260.2 C261.2 C264.2 C265.2 C283.2 C285.2 C286.1 C288.2 C289.2 C290.1 C291.1 C293.1 C297.1 C300.1 C301.1 C302.1 C303.1 C315.2 C317.1 C318.1 C319.1 C320.1 C321.1 C322.1 C323.1 C324.1 C325.1 C326.1 C327.1 C328.1 C329.1 C339.1 C340.1 C341.1 C342.1 C343.1 C344.1 C345.1 C346.1 C347.1 C348.2 C349.2 C350.1 C351.1 C352.1 C353.1 C354.1 C355.1 C356.1 C357.1 C358.1 C359.1 C360.1 C366.1 D4.2 D5.2 D6.2 D7.2 D8.2 D9.2 D10.2 D11.2 D12.2 H1.4 H55.1 H55.2 H55.11 H55.12 H55.21 H55.22 H55.28 H55.29 L14.1 LED4.1 OSC1.2 PS1.3 PS1.7 PS1.8 PS1.9 R7.2 R9.2 R12.2 R13.2 R16.2 R18.2 R20.2 R21.2 R22.1 R23.1 R39.2 R154.1 R157.1 R191.1 R193.1 R230.2 R231.2 R232.2 R233.2 R234.1 R287.1 R354.2 SW3.1 SW15.2 SW17.3 SW17.6 SW22.2 U2.2 U3.2 U7.8 U7.9 U8.8 U8.9 U9.3 U9.29 U10.8 U10.9 U17.8 U17.23 U17.35 U17.47 U18.4 U19.2 U20.2 U21.2 U22.2 U24.2 U25.2 U43.129 U46.3 U46.4 U46.7 U46.8 U54.4 U56.4 U57.3 U57.4 U57.7 U57.8 U58.3 U58.4 U58.7 U58.8 U58.10 U59.9 UART1.1 UART1.2 UART1.3 UART1.4 UART1.A1B12 UART1.B1A12 X1.2 X2.2 X2.4
VCC_3V3: C10.2 C11.2 C12.2 C13.2 C49.2 C88.1 C91.2 C93.1 C94.1 C97.1 C102.2 C117.2 C175.2 C176.2 C177.2 C179.2 C180.2 C181.2 C183.2 C184.2 C185.2 C186.2 C187.2 C188.2 C189.2 C190.2 C258.1 C259.1 C260.1 C261.1 C264.1 C265.1 C301.2 C302.2 C303.2 C339.2 C340.2 C341.2 C342.2 C343.2 C344.2 C345.2 C346.2 C347.2 C348.1 C349.1 C356.2 C357.2 C358.2 C359.2 C360.2 D9.1 D10.1 D11.1 D12.1 H1.1 H55.30 L1.1 L2.1 LED1.2 R8.1 R30.2 R37.1 R38.2 R160.1 R168.1 R191.2 R245.1 R246.2 R252.2 R253.2 R334.2 R335.1 R336.1 R351.1 R357.1 R358.2 R359.1 R362.1 R364.1 U2.3 U3.6 U8.6 U17.9 U17.24 U17.36 U17.48 U18.8 U19.5 U20.5 U21.5 U22.5 U24.5 U25.5 U43.8 U43.18 U43.28 U43.36 U43.44 U43.52 U43.60 U43.67 U43.75 U43.83 U43.91 U43.101 U43.110 U43.120 U46.5 U46.6 U54.8 U56.8 U58.9
VCC_5V: C14.2 C15.2 C16.2 C17.2 C19.2 C20.2 C21.2 C22.2 C30.2 C31.2 C103.1 C254.2 F1.2 LED15.2 PS1.4 R10.1 R19.1 R24.1 R184.1 R337.2 R338.2 U2.7 U7.3 U8.3 U10.3
VCC_PLL3V3: C26.2 C27.2 C28.2 C29.2 C119.2 C248.2 C286.2 C300.2 C366.2 L13.1 R26.2 R27.2 R29.2 R185.2 R193.2 R334.1 U10.6
VDD_1V2: C6.2 C7.2 C8.2 C9.2 C115.2 C192.2 C193.2 C194.2 C195.2 C196.2 C197.2 C198.2 C199.2 C200.2 C201.2 C202.2 C203.2 C204.2 C205.2 C206.2 C297.2 C317.2 C318.2 C319.2 C320.2 C321.2 C322.2 C323.2 C324.2 C325.2 C326.2 C327.2 C328.2 C329.2 C350.2 C351.2 C352.2 C353.2 C354.2 C355.2 R23.2 R183.2 U7.6 U43.5 U43.6 U43.7 U43.17 U43.27 U43.35 U43.43 U43.51 U43.59 U43.68 U43.76 U43.84 U43.92 U43.102 U43.111 U43.121
CLK_24M: R2.2 U43.117
CLK_SEL: R233.1 SW23.5 U43.115
CUST_I2C_SCL_IO_PAD: U43.109 U46.1
CUST_I2C_SDA_IO_PAD: U43.108 U46.2
CUST_PS2_PS2_CLK_I_PAD: R335.2 U2.4 U43.114
CUST_PS2_PS2_DAT_I_PAD: R336.2 U2.5 U43.107
CUST_PSRAM_CE_O_PAD: R362.2 U43.106 U56.1
CUST_PSRAM_SCLK_O_PAD: U43.113 U56.6
CUST_PSRAM_SIO0_IO_PAD: U43.105 U56.5
CUST_PSRAM_SIO1_IO_PAD: U43.104 U56.2
CUST_PSRAM_SIO2_IO_PAD: U43.103 U56.3
CUST_PSRAM_SIO3_IO_PAD: U43.89 U56.7
CUST_PWM_PWM_0_O_PAD: U43.88 U58.1
CUST_PWM_PWM_1_O_PAD: U43.87 U58.2
CUST_PWM_PWM_2_O_PAD: U43.90 U58.5
CUST_PWM_PWM_3_O_PAD: U43.86 U58.6
CUST_QSPI_DAT_0_IO_PAD: U43.85 U59.1
CUST_QSPI_DAT_1_IO_PAD: U43.41 U59.2
CUST_QSPI_DAT_2_IO_PAD: U43.42 U59.3
CUST_QSPI_DAT_3_IO_PAD: U43.21 U59.4
CUST_QSPI_SPI_CLK_O_PAD: U43.116 U59.10
CUST_QSPI_SPI_CSN_0_O_PAD: U43.20 U59.5
CUST_QSPI_SPI_CSN_1_O_PAD: U43.19 U59.6
CUST_QSPI_SPI_CSN_2_O_PAD: U43.16 U59.7
CUST_QSPI_SPI_CSN_3_O_PAD: U43.15 U59.8
CUST_SPFS_CLK_O_PAD: U20.3 U43.81
CUST_SPFS_CS_O_PAD: U19.3 U43.14
CUST_SPFS_MISO_I_PAD: U21.3 U43.13
CUST_SPFS_MOSI_O_PAD: U22.3 U43.12
CUST_UART_RX_I_PAD: U43.11 U46.9
CUST_UART_TX_O_PAD: U43.10 U46.10
EXT_RST_N_I_PAD: R40.1 U43.9
EXTCLK_I_PAD: R3.2 U43.119
FLASH_CLK: U20.4 U54.6
FLASH_CLK_O_PAD: U43.82 U57.1
FLASH_CS: R359.2 U19.4 U54.1
FLASH_CSB_O_PAD: U43.37 U57.2
FLASH_IO0_IO_PAD: U43.38 U57.5
FLASH_IO1_IO_PAD: U43.39 U57.6
FLASH_IO2_IO_PAD: U43.40 U57.9
FLASH_IO3_IO_PAD: U43.45 U57.10
FLASH_MISO: U21.4 U54.2
FLASH_MOSI: U22.4 U54.5
FLASH_SEL: SW17.2 SW17.5 U19.6 U20.6 U21.6 U22.6 U24.6 U25.6
GPIO_0_IO_PAD: H55.6 U43.46
GPIO_1_IO_PAD: H55.8 U43.55
GPIO_2_IO_PAD: H55.18 U43.56
GPIO_3_IO_PAD: H55.19 U43.57
GPIO_4_IO_PAD: H55.20 U43.58
GPIO_5_IO_PAD: H55.4 U43.26
GPIO_6_IO_PAD: H55.9 U43.25
GPIO_7_IO_PAD: H55.7 U43.24
GPIO_8_IO_PAD: H55.5 U43.23
GPIO_9_IO_PAD: H55.3 U43.22
GPIO_10_IO_PAD: H55.10 U43.47
GPIO_11_IO_PAD: H55.13 U43.48
GPIO_12_IO_PAD: H55.14 U43.49
GPIO_13_IO_PAD: H55.15 U43.50
GPIO_14_IO_PAD: H55.16 U43.53
GPIO_15_IO_PAD: H55.17 U43.54
HFP_BOOT0: R250.1 U17.44
HFP_NRST: R248.1 U17.7
HFP_PA2: R158.2 U17.12
HFP_SWCLK: D8.1 R247.1 U17.37
HFP_SWDIO: D7.1 R249.1 U17.34
HK_CSB_I_PAD: H55.24 U43.69
HK_SCK_I_PAD: H55.27 U43.70
HK_SDI_I_PAD: H55.26 U43.71
HK_SDO_O_PAD: H55.25 U43.72
IRQ_PIN_I_PAD: H55.23 R287.2 R364.2 U43.73
OSC_IN: C90.2 U17.5 X2.1
OSC_OUT: C89.2 U17.6 X2.3
PLL_3V3: C247.2 C249.2 C250.2 C361.2 C362.2 C363.2 C364.2 C365.2 L13.2 U43.3 U43.4 U43.122 U43.123
PLL_CFG_0_I_PAD: R232.1 SW23.6 U43.74
PLL_CFG_1_I_PAD: R231.1 SW23.7 U43.77
PLL_CFG_2_I_PAD: R230.1 SW23.8 U43.78
PS2_CLK_5V: PS1.5 R337.1 U2.1
PS2_DAT_5V: PS1.1 R338.1 U2.8
SOC_UD+: U9.4 U24.3
SOC_UD-: U9.5 U25.3
UART_RX_I_PAD: R14.2 U43.79
UART_TX_O_PAD: R15.2 U43.80
UD+: D4.1 U24.4 UART1.A6 UART1.B6
UD-: D5.1 U25.4 UART1.A7 UART1.B7
USB_5V: C18.1 C32.1 D6.1 SW9.2 UART1.A4B9 UART1.B4A9
$2N1960: D1.1 F1.1
$2N1963: LED1.1 R22.2
$2N1967: C116.1 C283.1 C290.2 R9.1 R184.2 U7.2
$2N1971: C115.1 R12.1 R182.2 U7.7
$2N1975: C120.1 C121.1 C285.1 C293.2 R16.1 R19.2 U10.2
$2N1979: C119.1 R17.2 R20.1 U10.7
$2N1982: C118.1 C288.1 C289.1 C291.2 R7.1 R10.2 U8.2
$2N1986: C117.1 R8.2 R13.1 U8.7
$2N1992: D1.2 SW9.3
$2N11476: R182.1 R183.1
$2N12075: R17.1 R185.1
$2N20005: LED15.1 R234.2
$3N4046: R1.2 X1.1
$3N4047: C1.1 C2.1 L1.2 R1.1 X1.4
$3N4048: C3.1 R2.1 X1.3
$3N4054: C35.2 OSC1.3 R3.1
$3N4056: C33.2 C34.2 L2.2 OSC1.4 R4.1
$3N4059: OSC1.1 R4.2
$3N4067: R38.1 R40.2 U3.1
$3N4073: SW3.3 U3.3
$3N4077: C48.2 U3.4
$3N4235: R26.1 SW23.1
$3N4236: R27.1 SW23.2
$3N4237: R29.1 SW23.3
$3N4238: R30.1 SW23.4
$3N134795: TP1.1 U43.112
$3N134800: TP2.1 U43.118
$3N136601: R37.2 R363.2
$3N136608: C50.2 R39.1 R363.1 U3.5
$3N136926: C247.1 C249.1 C250.1 C361.1 C362.1 C363.1 C364.1 C365.1 L14.2
$6N7771: R18.1 UART1.B5
$6N7772: R21.1 UART1.A5
$6N7781: C23.1 C24.1 R24.2 R25.1 U9.7 U9.8
$6N7784: C25.1 U9.6
$6N7792: R14.1 U9.26
$6N7795: R15.1 U9.25
$6N45740: C315.1 R25.2 SW22.1 U9.9
$6N66944: R358.1 U54.7
$6N66947: R357.2 U54.3
$7N1024: R153.2 U17.11
$7N1192: R154.2 U17.20
$7N1906: R158.1 R354.1 SW16.1
$7N3473: R160.2 SW17.1 SW17.4
$7N30991: R246.1 U18.7
$7N31054: R245.2 U18.3
$7N31312: H1.2 R247.2
$7N31318: H1.3 R249.2
$7N31327: C96.1 R248.2 SW15.1
$7N31335: R157.2 R250.2 SW14.1
$7N31378: R252.1 SW14.2
$7N31515: R253.1 SW16.2
$7N33995: LED4.2 R153.1
$8N407: R168.2 U2.6

Pads without a net: MARK1 1; MARK2 1; MARK3 1; MARK4 1; MARK5 1; MARK6 1; PS1 2 6; SCREW1 1; SCREW2 1; SCREW3 1; SCREW4 1; SW3 2 4; SW9 1; U7 1 4 5; U8 1 4 5; U9 1 2 10 11 12 13 14 15 16 17 18 19 20 21 22 23 24 27 28; U10 1 4 5; U17 1 2 3 4 10 13 18 19 21 22 29 30 31 38 39 40 41 42 43 45 46; U43 1 2 29 30 31 32 33 34 61 62 63 64 65 66 93 94 95 96 97 98 99 100 124 125 126 127 128; UART1 A8 B8

## Via types
v1: diameter 0.406, hole 0.203, TOP to BOTTOM, 643 vias

## Routing (per net, layer and track width the routed paths; a pad name or vN(x,y) marks a point on that pad's centre or on a via; arc(x,y) is an arc through that point)
3V3_HFP_SPI1_CLK: length 21.1
  TOP w0.157: v1(13.21,45.59) 12.47,46.33 U17.15 ; U20.1 29.83,42.4 v1(29.46,42.04)
  BOTTOM w0.157: v1(29.46,42.04) 28.24,41.53 21.79,41.53 13.31,45.54 v1(13.21,45.59)
3V3_HFP_SPI1_CS: length 21
  TOP w0.157: U19.1 24.24,41.64 v1(23.62,41.02) ; U17.14 11.97,45.94 v1(13.59,44.32)
  BOTTOM w0.157: v1(23.62,41.02) 19.52,41.02 19.36,41.18 19.36,41.75 19.21,41.91 18.89,41.91 18.73,41.75 18.73,41.18 18.58,41.02 18.26,41.02 18.1,41.18 18.1,41.75 17.95,41.91 17.63,41.91 17.47,41.75 17.47,41.18 17.32,41.02 16.89,41.02 15.68,42.23 15.68,42.61 15.39,42.9 15.01,42.9 v1(13.59,44.32)
3V3_HFP_SPI1_MISO: length 24.1
  TOP w0.157: U21.1 21.45,42.53 20.83,41.91 20.42,41.91 20.26,42.07 20.26,42.77 20.11,42.93 19.79,42.93 19.63,42.77 19.63,42.07 19.48,41.91 19.16,41.91 19,42.07 19,42.77 18.85,42.93 18.53,42.93 18.37,42.77 18.37,42.07 18.22,41.91 17.9,41.91 17.74,42.07 17.74,42.77 17.59,42.93 17.27,42.93 17.11,42.77 17.11,42.07 16.96,41.91 16.64,41.91 16.48,42.07 16.48,42.77 16.33,42.93 16.01,42.93 15.85,42.77 15.85,42.07 15.7,41.91 14.73,41.91 14.22,42.42 14.22,42.9 14.38,43.06 14.83,43.06 14.99,43.21 14.99,43.53 14.83,43.69 14.38,43.69 14.22,43.84 14.22,44.16 14.38,44.32 15.34,44.32 15.49,44.47 15.49,44.79 15.34,44.95 14.62,44.95 12.97,46.59 U17.16
3V3_HFP_SPI1_MOSI: length 24.1
  TOP w0.157: U22.1 27.04,42.81 26.42,43.43 20.44,43.43 20.28,43.59 20.28,44.55 20.13,44.7 19.81,44.7 19.65,44.55 19.65,43.59 19.5,43.43 19.18,43.43 19.02,43.59 19.02,44.55 18.87,44.7 18.55,44.7 18.39,44.55 18.39,43.59 18.24,43.43 17.92,43.43 17.76,43.59 17.76,44.55 17.61,44.7 17.29,44.7 17.13,44.55 17.13,43.59 16.98,43.43 16.64,43.43 16.38,43.69 16.38,45.09 15.94,45.53 14.8,45.53 13.47,46.86 U17.17
3V3_HFP_SPI2_CLK: length 8.8
  TOP w0.157: v1(13.59,53.09) 16.34,50.34 U17.26
  BOTTOM w0.157: U18.6 v1(13.59,53.09)
3V3_HFP_SPI2_CS: length 9
  TOP w0.157: U17.25 v1(17.4,49.83)
  BOTTOM w0.157: v1(17.4,49.83) 17.42,49.86 R351.2 18.97,49.86 19.18,49.66 19.18,47.78 19.02,47.62 16.38,47.62 16.13,47.88 U18.1
3V3_HFP_SPI2_MISO: length 8.9
  TOP w0.157: U17.27 17.43,50.84 v1(17.4,50.8)
  BOTTOM w0.157: U18.2 14.86,52.42 15.02,52.58 16.38,52.58 16.51,52.45 16.51,51.08 16.79,50.8 v1(17.4,50.8)
3V3_HFP_SPI2_MOSI: length 9
  TOP w0.157: v1(12.32,54.36) 12.95,53.72 13.97,53.72 16.36,51.34 U17.28
  BOTTOM w0.157: U18.5 v1(12.32,54.36)
3V3_HFP_USB_DN: length 36.5
  TOP w0.155: U25.1 48.21,51.25 43.24,46.28 34.74,46.28 31.8,49.22 31.8,51.68 30.06,53.42 19.64,53.42 19.55,53.33 U17.32
3V3_HFP_USB_DP: length 36.5
  TOP w0.155: U17.33 19.55,53.84 19.64,53.75 30.2,53.75 32.13,51.82 32.13,49.35 32.42,49.07 32.82,49.07 33.06,48.83 33.06,48.43 34.87,46.61 43.11,46.61 46.08,49.58 46.57,50.07 46.57,50.31 46.42,50.47 45.7,50.47 45.55,50.62 U24.1
GND: length 748.8
  TOP w0.203: D12.2 7.11,34.9 ; D12.2 D10.2 ; D12.2 7.44,34.64 ; D10.2 6.15,34.64 ; D10.2 6.48,34.9 ; 51.91,54.71 51.88,54.68 D6.2 ; D6.2 51.88,53.98 51.91,53.95 ; D6.2 52.16,54.33
  TOP w0.254: U17.23 16.47,47.2 v1(16.26,46.99) ; C285.2 v1(48.26,38.57) ; v1(64.01,7.11) C289.2 ; U9.3 v1(39.33,51.8) ; v1(50.93,38.57) C121.2 ; C118.2 v1(62.19,7.84) ; 58.04,37.62 58.04,38.12
  TOP w0.305: U46.3 1.91,36.59 ; U46.3 2.93,35.56 ; U46.3 0.88,35.56 ; C33.1 31.79,31.59 ; C33.1 v1(31.37,30.86) 31.37,29.84 v1(31.24,29.72) 30.23,28.7 v1(30.23,27.89) 30.23,27 v1(30.28,26.95) ; C33.1 30.95,31.59 ; 35.69,39.43 R193.1 ; R193.1 37.25,40.21 ; R193.1 34.12,40.21 ; C16.1 63.28,13.63 ; C16.1 62.87,14.17 ; C16.1 62.45,13.63 ; C31.1 50.84,44.36 ; C31.1 50,44.36 ; C31.1 50.42,44.91 ; D9.2 v1(63.42,6.02) ; C315.2 v1(35.59,58.39) ; U17.47 11.95,57.77 v1(12.05,57.87) ; C14.1 62.74,22.17 ; C14.1 63.16,21.63 ; C14.1 62.32,21.63 ; C21.1 68.36,51.47 ; C21.1 67.53,51.47 ; C21.1 67.94,52.02 ; 52.96,17.96 C6.1 ; C6.1 53.38,18.5 ; C6.1 52.54,18.5 ; C17.1 64.14,14.17 ; C17.1 64.55,13.63 ; C17.1 63.72,13.63 ; SW17.3 v1(57.74,50.46) ; 3.42,35.56 U46.4 ; U46.4 4.45,36.59 ; U46.4 5.47,35.56 ; 51.69,17.96 C8.1 ; C8.1 51.27,18.5 ; C8.1 52.11,18.5 ; SW17.6 v1(57.74,47.79) ; U25.2 v1(48.86,50.88) ; U54.4 v1(23.88,48.01) ; U56.4 v1(42.75,32.38) ; SW15.2 v1(18.41,31.43) ; C15.1 64.43,21.63 ; C15.1 64.01,22.17 ; C15.1 63.59,21.63 ; C20.1 69.76,51.47 ; C20.1 69.34,52.02 ; C20.1 68.92,51.47 ; U17.8 9.01,51.82 v1(8.92,51.92) 8.13,51.13 v1(8.13,50.55) 8.13,50.29 7.87,50.04 v1(6.06,50.04) C89.1 v1(6.06,51.26) 6.06,52 X2.2 4.85,52.3 v1(4.7,52.45) v1(4.7,54.99) 4.7,56.01 v1(5.08,56.39) 5.69,57 v1(6.86,57) 6.92,57 7.23,56.69 C90.1 7.47,55.86 v1(7.47,55.55) X2.4 7.99,54.5 v1(8.64,53.85) ; C302.1 C339.1 v1(23.11,23.15) ; SW3.1 v1(9.27,26.25) ; D7.2 v1(22.23,60.45) ; v1(16.26,46.99) 16.18,46.91 R154.1 ; C96.2 12.15,45.12 v1(12.32,44.96) ; 51.82,9.83 C13.1 ; C13.1 52.24,10.38 ; C13.1 51.4,10.38 ; 43.74,54.8 C32.2 ; C32.2 43.19,55.22 ; C32.2 43.74,55.64 ; R23.1 49.28,18.4 ; R23.1 47.71,17.61 ; R23.1 49.28,16.82 ; R23.1 50.84,17.61 ; U17.35 19.43,54.84 v1(19.53,54.74) ; U20.2 v1(30.48,42.04) ; U22.2 v1(27.69,42.04) ; 38.1,40.56 C29.1 ; C29.1 37.68,41.11 ; C29.1 38.52,41.11 ; U19.2 v1(24.89,42.04) ; C23.2 v1(42,54.84) ; SW22.2 v1(38.23,60.96) ; D11.2 v1(68.71,12.45) ; 27.74,28.57 C35.1 ; C35.1 v1(28.28,29.08) 28.08,29.29 OSC1.2 v1(27.05,30.27) ; C35.1 28.28,28.16 ; C103.2 v1(58.04,31.5) ; R354.2 v1(6.66,44.88) ; C18.2 52.2,55.64 ; C18.2 52.74,55.22 ; C18.2 52.2,54.8 ; 53.09,9.83 C12.1 52.67,10.38 ; 50.97,9.48 R191.1 49.4,8.69 ; v1(58.35,39.5) C102.1 58.35,38.43 58.04,38.12 ; UART1.2 43.36,59.28 ; UART1.2 43.36,56.82 ; UART1.2 42.68,58.05 ; C30.1 49.57,44.36 ; C30.1 48.73,44.36 ; C30.1 49.15,44.91 ; 33.03,29.32 X1.2 v1(32.05,30.27) ; 38.95,41.11 C27.1 39.37,40.56 ; C34.1 v1(32.77,34.29) ; v1(64.87,15.98) 64.93,16.05 C116.2 ; U21.2 v1(22.1,42.04) ; UART1.1 52,59.28 ; UART1.1 52.68,58.05 ; UART1.1 52,56.82 ; C24.2 v1(38.13,58.27) ; v1(32.23,27.89) 32.36,28.02 v1(35.92,28.02) 35.92,28.56 C3.2 35.88,29.78 v1(36.32,30.23) C2.2 v1(36.96,30.95) C1.2 ; D8.2 v1(19.11,59.89) ; R9.2 65.35,18.03 v1(65.41,17.98) ; D4.2 v1(46.97,56.49) ; R157.1 v1(14.22,60.45) ; R234.1 v1(61.82,45.44) ; C25.2 v1(42,53.57) ; LED4.1 v1(7.78,48.3) ; D5.2 v1(49.39,55.25) ; R22.1 v1(45.09,12.7) ; R287.1 42.09,16.31 v1(41.91,16.13) ; U24.2 v1(46.2,50.9) ; C88.2 v1(18.58,46.83)
  TOP w0.61: C254.1 v1(60.87,33.06)
  GND02 w0.305: 51.32,62.23 UART1.4 ; UART1.4 52.68,62.23 ; UART1.4 52,61.25 ; UART1.4 52,63.21 ; H55.12 40.79,4.26 ; H55.12 39.81,3.28 ; H55.12 38.83,4.26 ; H55.12 39.81,5.23 ; H55.28 60.13,5.23 ; H55.28 59.15,4.26 ; H55.28 60.13,3.28 ; H55.28 61.11,4.26 ; U58.4 73.41,20.21 ; U58.4 72.38,19.18 ; U58.4 73.41,18.15 ; 0.88,35.56 U46.3 ; U46.3 1.91,36.59 ; U46.3 1.91,34.53 ; U46.3 2.93,35.56 ; UART1.3 43.36,63.21 ; UART1.3 43.36,61.25 ; UART1.3 44.04,62.23 ; UART1.3 42.68,62.23 ; 52.51,3.28 H55.22 ; H55.22 52.51,5.23 ; H55.22 53.49,4.26 ; H55.22 51.53,4.26 ; 43.36,56.82 UART1.2 ; UART1.2 42.68,58.05 ; UART1.2 43.36,59.28 ; UART1.2 44.04,58.05 ; 12.69,1.72 U57.8 ; U57.8 13.72,0.69 ; U57.8 14.74,1.72 ; U57.8 13.72,2.74 ; UART1.1 52.68,58.05 ; UART1.1 52,59.28 ; UART1.1 52,56.82 ; UART1.1 51.32,58.05 ; 18.8,0.69 U57.4 ; U57.4 17.77,1.72 ; U57.4 19.82,1.72 ; U57.4 18.8,2.74 ; U57.3 19.82,4.26 ; U57.3 18.8,5.28 ; U57.3 17.77,4.26 ; U57.3 18.8,3.23 ; 26.04,61.96 H1.4 ; H1.4 27.06,62.99 ; H1.4 26.04,64.02 ; H1.4 25.01,62.99 ; U58.10 73.41,12.59 ; U58.10 73.41,10.53 ; U58.10 72.38,11.56 ; U57.7 14.74,4.26 ; U57.7 13.72,3.23 ; U57.7 12.69,4.26 ; U57.7 13.72,5.28 ; H55.1 27.11,2.69 ; H55.1 27.11,0.74 ; H55.1 26.13,1.72 ; H55.1 28.09,1.72 ; U59.9 4.45,21.86 ; U59.9 4.45,19.8 ; U59.9 3.42,20.83 ; U59.9 5.47,20.83 ; 61.69,1.72 H55.29 ; H55.29 62.67,2.69 ; H55.29 62.67,0.74 ; H55.29 63.65,1.72 ; 70.87,13.07 70.87,14.1 ; 70.87,14.1 71.89,14.1 ; 70.87,14.1 69.84,14.1 ; 70.87,14.1 70.87,15.13 ; 26.13,4.26 H55.2 ; H55.2 28.09,4.26 ; H55.2 27.11,5.23 ; H55.2 27.11,3.28 ; U58.3 71.89,19.18 ; U58.3 70.87,18.15 ; U58.3 70.87,20.21 ; U58.3 69.84,19.18 ; H55.21 53.49,1.72 ; H55.21 52.51,2.69 ; H55.21 51.53,1.72 ; H55.21 52.51,0.74 ; 73.41,14.1 73.41,15.13 ; 73.41,14.1 73.41,13.07 ; 73.41,14.1 72.38,14.1 ; PS1.3 66.15,38.21 ; PS1.3 65.17,37.23 ; PS1.3 67.13,37.23 ; PS1.3 66.15,36.25 ; U46.8 5.47,30.48 ; U46.8 4.45,31.51 ; U46.8 3.42,30.48 ; U46.8 4.45,29.45 ; 3.42,35.56 U46.4 ; U46.4 4.45,36.59 ; U46.4 4.45,34.53 ; U46.4 5.47,35.56 ; 1.91,29.45 U46.7 ; U46.7 2.93,30.48 ; U46.7 1.91,31.51 ; U46.7 0.88,30.48 ; 39.81,0.74 H55.11 ; H55.11 38.83,1.72 ; H55.11 40.79,1.72 ; H55.11 39.81,2.69
  GND02 w0.635: PS1.9 71.6,40.68 ; PS1.9 69.43,38.51 ; PS1.9 69.43,42.85 ; PS1.9 67.26,40.68 ; 70.43,31.66 PS1.7 ; PS1.7 70.43,36 ; PS1.7 68.25,33.83 ; PS1.7 72.6,33.83 ; PS1.8 71.6,26.98 ; PS1.8 67.26,26.98 ; PS1.8 69.43,24.81 ; PS1.8 69.43,29.15
  PWR03 w0.305: 42.68,62.23 UART1.3 ; UART1.3 43.36,61.25 ; UART1.3 44.04,62.23 ; UART1.3 43.36,63.21 ; 4.45,19.8 U59.9 ; U59.9 5.47,20.83 ; U59.9 4.45,21.86 ; U59.9 3.42,20.83 ; 0.88,30.48 U46.7 ; U46.7 1.91,29.45 ; U46.7 1.91,31.51 ; U46.7 2.93,30.48 ; U57.3 19.82,4.26 ; U57.3 17.77,4.26 ; U57.3 18.8,3.23 ; 26.04,61.96 H1.4 ; H1.4 25.01,62.99 ; H1.4 27.06,62.99 ; H1.4 26.04,64.02 ; 73.41,14.1 73.41,15.13 ; 73.41,14.1 73.41,13.07 ; 73.41,14.1 72.38,14.1 ; UART1.2 43.36,59.28 ; UART1.2 44.04,58.05 ; UART1.2 42.68,58.05 ; UART1.1 52.68,58.05 ; UART1.1 51.32,58.05 ; UART1.1 52,59.28 ; H55.1 27.11,2.69 ; H55.1 28.09,1.72 ; H55.1 26.13,1.72 ; H55.1 27.11,0.74 ; 39.81,0.74 H55.11 ; H55.11 39.81,2.69 ; H55.11 40.79,1.72 ; H55.11 38.83,1.72 ; U57.4 18.8,2.74 ; U57.4 19.82,1.72 ; U57.4 17.77,1.72 ; U57.4 18.8,0.69 ; 13.72,3.23 U57.7 ; U57.7 14.74,4.26 ; U57.7 12.69,4.26 ; 72.38,11.56 U58.10 ; U58.10 73.41,12.59 ; U58.10 73.41,10.53 ; 27.11,3.28 H55.2 ; H55.2 26.13,4.26 ; H55.2 28.09,4.26 ; 52,61.25 UART1.4 ; UART1.4 52.68,62.23 ; UART1.4 51.32,62.23 ; UART1.4 52,63.21 ; U46.4 5.47,35.56 ; U46.4 4.45,34.53 ; U46.4 4.45,36.59 ; U46.4 3.42,35.56 ; 39.81,3.28 H55.12 ; H55.12 40.79,4.26 ; H55.12 38.83,4.26 ; 73.41,18.15 U58.4 ; U58.4 72.38,19.18 ; U58.4 73.41,20.21 ; U57.8 13.72,2.74 ; U57.8 12.69,1.72 ; U57.8 13.72,0.69 ; U57.8 14.74,1.72 ; H55.21 52.51,2.69 ; H55.21 53.49,1.72 ; H55.21 52.51,0.74 ; H55.21 51.53,1.72 ; 69.84,14.1 70.87,14.1 ; 70.87,14.1 70.87,13.07 ; 70.87,14.1 71.89,14.1 ; 70.87,14.1 70.87,15.13 ; 1.91,34.53 U46.3 ; U46.3 0.88,35.56 ; U46.3 2.93,35.56 ; U46.3 1.91,36.59 ; 62.67,0.74 H55.29 ; H55.29 63.65,1.72 ; H55.29 62.67,2.69 ; H55.29 61.69,1.72 ; H55.22 53.49,4.26 ; H55.22 52.51,3.28 ; H55.22 51.53,4.26 ; U46.8 4.45,31.51 ; U46.8 3.42,30.48 ; U46.8 4.45,29.45 ; U46.8 5.47,30.48 ; 59.15,4.26 H55.28 ; H55.28 61.11,4.26 ; H55.28 60.13,3.28 ; U58.3 71.89,19.18 ; U58.3 70.87,20.21 ; U58.3 69.84,19.18 ; U58.3 70.87,18.15
  PWR03 w0.635: 70.43,31.66 PS1.7 ; PS1.7 72.6,33.83 ; PS1.7 70.43,36 ; PS1.9 71.6,40.68 ; PS1.9 69.43,38.51 ; PS1.9 67.26,40.68 ; PS1.9 69.43,42.85 ; PS1.8 71.6,26.98 ; PS1.8 67.26,26.98 ; PS1.8 69.43,24.81 ; PS1.8 69.43,29.15
  ART04 w0.305: 3.42,20.83 U59.9 ; U59.9 5.47,20.83 ; U59.9 4.45,21.86 ; U59.9 4.45,19.8 ; H55.1 27.11,2.69 ; H55.1 27.11,0.74 ; H55.1 26.13,1.72 ; H55.1 28.09,1.72 ; 4.45,34.53 U46.4 ; U46.4 3.42,35.56 ; U46.4 5.47,35.56 ; 43.36,56.82 UART1.2 ; UART1.2 42.68,58.05 ; UART1.2 44.04,58.05 ; UART1.2 43.36,59.28 ; U58.3 71.89,19.18 ; U58.3 69.84,19.18 ; U58.3 70.87,18.15 ; U58.3 70.87,20.21 ; 70.87,13.07 70.87,14.1 ; 70.87,14.1 70.87,15.13 ; 70.87,14.1 69.84,14.1 ; 70.87,14.1 71.89,14.1 ; 59.15,4.26 H55.28 ; H55.28 60.13,5.23 ; H55.28 60.13,3.28 ; H55.28 61.11,4.26 ; UART1.4 52.68,62.23 ; UART1.4 52,61.25 ; UART1.4 51.32,62.23 ; UART1.4 52,63.21 ; U46.7 1.91,31.51 ; U46.7 1.91,29.45 ; U46.7 2.93,30.48 ; U46.7 0.88,30.48 ; H55.29 63.65,1.72 ; H55.29 61.69,1.72 ; H55.29 62.67,2.69 ; H55.29 62.67,0.74 ; 3.42,30.48 U46.8 ; U46.8 4.45,31.51 ; U46.8 5.47,30.48 ; U46.8 4.45,29.45 ; H55.12 39.81,5.23 ; H55.12 40.79,4.26 ; H55.12 38.83,4.26 ; H55.12 39.81,3.28 ; 25.01,62.99 H1.4 ; H1.4 26.04,64.02 ; H1.4 27.06,62.99 ; H1.4 26.04,61.96 ; UART1.1 52,59.28 ; UART1.1 52.68,58.05 ; UART1.1 51.32,58.05 ; UART1.1 52,56.82 ; 0.88,35.56 U46.3 ; U46.3 2.93,35.56 ; U46.3 1.91,36.59 ; U46.3 1.91,34.53 ; 43.36,61.25 UART1.3 ; UART1.3 43.36,63.21 ; UART1.3 42.68,62.23 ; UART1.3 44.04,62.23 ; 73.41,18.15 U58.4 ; U58.4 72.38,19.18 ; U58.4 73.41,20.21 ; 73.41,10.53 U58.10 ; U58.10 73.41,12.59 ; U58.10 72.38,11.56 ; 51.53,1.72 H55.21 ; H55.21 52.51,2.69 ; H55.21 53.49,1.72 ; H55.21 52.51,0.74 ; PS1.3 67.13,37.23 ; PS1.3 66.15,38.21 ; PS1.3 65.17,37.23 ; PS1.3 66.15,36.25 ; H55.22 52.51,5.23 ; H55.22 52.51,3.28 ; H55.22 51.53,4.26 ; H55.22 53.49,4.26 ; 39.81,0.74 H55.11 ; H55.11 40.79,1.72 ; H55.11 38.83,1.72 ; H55.11 39.81,2.69 ; 13.72,0.69 U57.8 ; U57.8 12.69,1.72 ; U57.8 14.74,1.72 ; 26.13,4.26 H55.2 ; H55.2 27.11,3.28 ; H55.2 28.09,4.26 ; 72.38,14.1 73.41,14.1 ; 73.41,14.1 73.41,15.13 ; 73.41,14.1 73.41,13.07
  ART04 w0.635: PS1.8 69.43,29.15 ; PS1.8 71.6,26.98 ; PS1.8 69.43,24.81 ; PS1.8 67.26,26.98 ; 69.43,38.51 PS1.9 ; PS1.9 67.26,40.68 ; PS1.9 71.6,40.68 ; PS1.9 69.43,42.85 ; PS1.7 72.6,33.83 ; PS1.7 70.43,36 ; PS1.7 70.43,31.66 ; PS1.7 68.25,33.83
  GND05 w0.305: 42.68,58.05 UART1.2 ; UART1.2 44.04,58.05 ; UART1.2 43.36,59.28 ; UART1.2 43.36,56.82 ; 0.88,35.56 U46.3 ; U46.3 1.91,36.59 ; U46.3 2.93,35.56 ; U46.3 1.91,34.53 ; H55.28 61.11,4.26 ; H55.28 59.15,4.26 ; H55.28 60.13,3.28 ; H55.28 60.13,5.23 ; 26.13,1.72 H55.1 ; H55.1 28.09,1.72 ; H55.1 27.11,2.69 ; H55.1 27.11,0.74 ; H55.11 39.81,2.69 ; H55.11 38.83,1.72 ; H55.11 39.81,0.74 ; H55.11 40.79,1.72 ; H55.29 63.65,1.72 ; H55.29 61.69,1.72 ; H55.29 62.67,0.74 ; H55.29 62.67,2.69 ; 13.72,3.23 U57.7 ; U57.7 14.74,4.26 ; U57.7 13.72,5.28 ; U57.7 12.69,4.26 ; 69.84,19.18 U58.3 ; U58.3 71.89,19.18 ; U58.3 70.87,18.15 ; U58.3 70.87,20.21 ; 43.36,61.25 UART1.3 ; UART1.3 42.68,62.23 ; UART1.3 44.04,62.23 ; UART1.3 43.36,63.21 ; U59.9 4.45,21.86 ; U59.9 4.45,19.8 ; U59.9 3.42,20.83 ; U59.9 5.47,20.83 ; H55.2 27.11,5.23 ; H55.2 27.11,3.28 ; H55.2 26.13,4.26 ; H55.2 28.09,4.26 ; H55.22 52.51,5.23 ; H55.22 52.51,3.28 ; H55.22 53.49,4.26 ; H55.22 51.53,4.26 ; U57.4 18.8,2.74 ; U57.4 19.82,1.72 ; U57.4 17.77,1.72 ; U57.4 18.8,0.69 ; 26.04,61.96 H1.4 ; H1.4 27.06,62.99 ; H1.4 26.04,64.02 ; H1.4 25.01,62.99 ; UART1.4 52,63.21 ; UART1.4 52,61.25 ; UART1.4 52.68,62.23 ; UART1.4 51.32,62.23 ; 4.45,34.53 U46.4 ; U46.4 3.42,35.56 ; U46.4 4.45,36.59 ; U46.4 5.47,35.56 ; 73.41,10.53 U58.10 ; U58.10 73.41,12.59 ; U58.10 72.38,11.56 ; 72.38,14.1 73.41,14.1 ; 73.41,14.1 73.41,13.07 ; 73.41,14.1 73.41,15.13 ; 51.53,1.72 H55.21 ; H55.21 53.49,1.72 ; H55.21 52.51,2.69 ; H55.21 52.51,0.74 ; 69.84,14.1 70.87,14.1 ; 70.87,14.1 71.89,14.1 ; 70.87,14.1 70.87,13.07 ; 70.87,14.1 70.87,15.13 ; 13.72,0.69 U57.8 ; U57.8 12.69,1.72 ; U57.8 13.72,2.74 ; U57.8 14.74,1.72 ; 4.45,29.45 U46.8 ; U46.8 5.47,30.48 ; U46.8 3.42,30.48 ; U46.8 4.45,31.51 ; 72.38,19.18 U58.4 ; U58.4 73.41,20.21 ; U58.4 73.41,18.15 ; 18.8,3.23 U57.3 ; U57.3 19.82,4.26 ; U57.3 17.77,4.26 ; U57.3 18.8,5.28 ; 65.17,37.23 PS1.3 ; PS1.3 66.15,38.21 ; PS1.3 66.15,36.25 ; PS1.3 67.13,37.23 ; H55.12 40.79,4.26 ; H55.12 38.83,4.26 ; H55.12 39.81,5.23 ; H55.12 39.81,3.28 ; UART1.1 52.68,58.05 ; UART1.1 52,59.28 ; UART1.1 51.32,58.05 ; UART1.1 52,56.82 ; U46.7 2.93,30.48 ; U46.7 1.91,29.45 ; U46.7 0.88,30.48 ; U46.7 1.91,31.51
  GND05 w0.635: 69.43,38.51 PS1.9 ; PS1.9 67.26,40.68 ; PS1.9 69.43,42.85 ; PS1.9 71.6,40.68 ; 68.25,33.83 PS1.7 ; PS1.7 70.43,36 ; PS1.7 72.6,33.83 ; PS1.7 70.43,31.66 ; 69.43,24.81 PS1.8 ; PS1.8 69.43,29.15 ; PS1.8 67.26,26.98 ; PS1.8 71.6,26.98
  BOTTOM w0.254: C118.2 v1(62.19,7.84) ; C285.2 v1(48.26,38.57)
  BOTTOM w0.305: C93.2 8.98,51.98 v1(8.92,51.92) ; C355.1 v1(36.92,21.17) ; v1(34.54,21.21) 35.05,21.72 C319.1 ; C13.1 52.24,10.38 ; C13.1 51.4,10.38 ; C13.1 51.82,9.83 ; C325.1 28.96,17.65 v1(29.46,18.16) 28.87,18.76 C201.1 ; v1(12.32,50.29) U18.4 ; C8.1 52.11,18.5 ; C8.1 51.69,17.96 ; C8.1 51.27,18.5 ; C50.1 v1(10.29,27.43) ; C357.1 C187.1 v1(34.07,24) ; v1(39.97,25.11) C194.1 39.71,24.51 v1(39.37,24.17) C320.1 ; R7.2 60.4,9.44 ; R7.2 59.97,9.02 ; R7.2 60.4,8.6 ; C340.1 26.12,12.54 v1(26.42,12.83) C200.1 ; v1(40.39,17.02) 39.03,18.38 C354.1 ; C323.1 v1(30.73,14.9) C196.1 ; v1(48.77,27.94) R233.2 R232.2 ; v1(12.05,57.87) 12.23,58.05 C94.2 ; C189.1 24.09,15.02 v1(23.5,15.62) ; v1(29.46,20.19) 29.3,20.03 C328.1 v1(28.03,20.03) C203.1 26.92,20.03 C199.1 25.53,20.66 C197.1 C326.1 23.84,21.04 v1(22.99,20.19) ; C198.1 v1(33.24,22.19) C329.1 ; R16.2 46.68,40.17 ; R16.2 46.68,39.33 ; R16.2 46.25,39.75 ; C181.1 v1(41.06,22.7) C344.1 ; v1(35.05,24) 35.65,24.6 C180.1 C342.1 ; C185.1 33.18,10.67 v1(33.53,10.67) 34,10.67 C347.1 ; C360.1 v1(30.7,10.38) C190.1 ; R18.2 v1(45.94,58.65) ; C192.1 49.7,18.38 ; C192.1 48.86,18.38 ; C192.1 49.28,17.83 ; C265.2 24.29,42.63 v1(24.89,42.04) ; v1(27.2,17.12) 26.91,17.12 C301.1 25.74,17.49 25.24,16.98 C345.1 ; 53.54,16.73 R12.2 ; R12.2 53.11,17.14 ; R12.2 53.54,17.56 ; C348.2 v1(26,52.49) ; 47.59,18.38 C193.1 ; C193.1 48.43,18.38 ; C193.1 48.01,17.83 ; C290.1 60.09,17.59 ; C290.1 60.09,15.94 ; C290.1 59.22,16.76 ; C176.1 v1(41.95,10.76) ; C259.2 47.08,56.38 v1(46.97,56.49) ; 37.68,41.11 C29.1 ; C29.1 38.1,40.56 ; C29.1 38.52,41.11 ; C205.1 31.53,24.37 v1(31.98,23.93) ; C286.1 23.71,35.22 ; C286.1 23.71,34.38 ; C286.1 23.17,34.8 ; C346.1 C186.1 26.73,10.25 v1(26.64,10.34) ; 38.95,41.11 C27.1 39.37,40.56 ; C293.1 46.75,42.23 ; C293.1 46.75,40.58 ; C293.1 45.89,41.4 ; v1(35.56,21.21) 36.32,21.97 C206.1 ; 23.71,36.92 C248.1 ; C248.1 23.17,37.34 ; C248.1 23.71,37.76 ; C116.2 64.93,16.05 v1(64.87,15.98) ; C21.1 67.94,52.02 ; C21.1 68.36,51.47 ; C21.1 67.53,51.47 ; v1(49.39,55.25) 49.13,55.51 C258.2 ; R230.2 R231.2 v1(48.64,25.4) ; C184.1 36.2,10 C341.1 37.5,10 v1(37.72,9.78) ; v1(35.56,16.13) 35.94,16.51 C318.1 ; R13.2 57.25,9.14 ; R13.2 56.82,9.56 ; R13.2 56.82,8.72 ; 52.96,17.96 C6.1 ; C6.1 52.54,18.5 ; C6.1 53.38,18.5 ; C356.1 v1(41.19,13.75) C179.1 ; C297.1 37.81,12.19 v1(38.61,12.19) C351.1 ; C177.1 v1(38.9,9.82) ; C204.1 35.69,19.3 v1(35.56,19.18) ; C183.1 v1(37.47,15.58) 37.47,15.57 37.05,15.15 C202.1 36.07,14.9 C321.1 ; C195.1 v1(28.74,13.3) C350.1 v1(28.74,14.77) C324.1 ; C20.1 69.34,52.02 ; C20.1 69.76,51.47 ; C20.1 68.92,51.47 ; 23.17,36.07 C366.1 ; C366.1 23.71,35.65 ; C366.1 23.71,36.49 ; C264.2 31.08,42.63 v1(30.48,42.04) ; C322.1 v1(33.18,14.9) C353.1 ; C317.1 v1(30.94,22.19) C327.1 ; v1(35.56,17.14) 36.2,17.78 C352.1 ; C175.1 v1(40.64,10.76) ; 39.39,39.75 R20.2 ; R20.2 39.83,40.17 ; R20.2 39.83,39.33 ; 60.47,9.84 C291.1 ; C291.1 60.47,11.49 ; C291.1 59.6,10.67 ; v1(22.1,42.04) 21.5,42.63 C261.2 ; 23.71,33.11 C300.1 ; C300.1 23.17,33.53 ; C300.1 23.71,33.95 ; v1(41.91,16.13) 41.78,16.26 C358.1 ; C188.1 41.19,18.63 40.79,19.02 v1(40.79,19.23) 40.79,19.33 41.19,19.72 C343.1 ; C359.1 30.31,27.89 v1(30.23,27.89) 30.05,27.89 29.72,27.56 C303.1 ; C91.1 19.37,54.57 v1(19.53,54.74) ; C48.1 v1(11.14,25.27) ; U3.2 v1(13.72,22.73) ; C97.2 v1(15.49,59.35) ; v1(27.69,42.04) 27.09,42.63 C260.2 ; 52.67,10.38 C12.1 53.09,9.83 ; C49.1 v1(16.89,27.22) ; R21.2 v1(48.99,58.65) ; C349.2 v1(47.03,38.14) ; R39.2 v1(12.9,28.37)
  vias: v1(1.02,50.04) v1(1.14,57.02) v1(1.14,54.86) v1(1.14,52.45) v1(1.14,47.5) v1(1.14,45.09) v1(1.14,42.67) v1(1.14,40.39) v1(1.14,26.04) v1(1.14,22.86) v1(1.4,8) v1(2.92,56.01) v1(3.43,52.45) v1(3.43,42.42) v1(3.56,44.83) v1(3.81,47.62) v1(3.94,50.29) v1(4.7,41.02) v1(5.71,7.87) v1(6.73,36.07) v1(6.73,35.18) v1(7.11,25.91) v1(7.24,58.42) v1(7.32,38.4) v1(7.37,29.34) v1(7.49,19.56) v1(7.62,36.07) v1(7.62,35.18) v1(7.87,15.11) v1(8,64.01) v1(8.26,41.78) v1(8.89,61.72) v1(8.89,1.14) v1(9.02,3.81) v1(9.14,6.22) v1(9.27,58.8) v1(11.43,63.75) v1(11.43,7.87) v1(11.81,39.5) v1(12.95,30.35) v1(13.21,43.43) v1(13.59,63.88) v1(15.37,8.26) v1(15.75,15.62) v1(16.89,38.48) v1(17.02,33.4) v1(18.54,18.41) v1(18.8,23.37) v1(18.92,57.4) v1(21.59,39.37) v1(21.97,23.24) v1(22.1,13.46) v1(22.23,11.18) v1(22.73,36.7) v1(22.73,35.43) v1(22.73,34.16) v1(22.73,32.89) v1(22.99,55.63) v1(23.75,46.35) v1(23.75,36.7) v1(23.75,35.43) v1(23.75,34.16) v1(23.75,32.89) v1(24.64,57.78) v1(25.27,55.12) v1(25.65,11.3) v1(25.78,59.18) v1(26.92,33.66) v1(26.92,32.26) v1(28.19,60.83) v1(28.32,38.86) v1(28.45,37.34) v1(28.45,35.31) v1(28.57,56.77) v1(28.83,64.01) v1(29.21,40.64) v1(29.46,21.21) v1(29.46,19.18) v1(29.46,17.14) v1(29.46,16.13) v1(30.48,21.21) v1(30.48,20.19) v1(30.48,19.18) v1(30.48,18.16) v1(30.48,17.14) v1(30.48,16.13) v1(30.91,37.77) v1(31.37,54.86) v1(31.5,21.21) v1(31.5,20.19) v1(31.5,19.18) v1(31.5,18.16) v1(31.5,17.14) v1(31.5,16.13) v1(31.62,57.4) v1(31.75,40.51) v1(32,64.14) v1(32.38,46.1) v1(32.38,8.26) v1(32.51,21.21) v1(32.51,20.19) v1(32.51,19.18) v1(32.51,18.16) v1(32.51,17.14) v1(32.51,16.13) v1(33.53,21.21) v1(33.53,20.19) v1(33.53,19.18) v1(33.53,18.16) v1(33.53,17.14) v1(33.53,16.13) v1(34.54,20.19) v1(34.54,19.18) v1(34.54,18.16) v1(34.54,17.14) v1(34.54,16.13) v1(35.02,52.3) v1(35.05,60.45) v1(35.18,39.24) v1(35.31,64.14) v1(35.56,20.19) v1(35.56,18.16) v1(35.69,30.99) v1(36.03,53.31) v1(36.03,52.3) v1(36.03,51.28) v1(36.45,39.24) v1(37.05,52.3) v1(37.47,41.02) v1(37.47,40.13) v1(37.47,39.24) v1(38.35,40.13) v1(38.35,39.24) v1(38.48,29.59) v1(38.61,25.53) v1(38.73,64.14) v1(38.73,41.02) v1(39.08,55.47) v1(39.24,40.13) v1(39.24,39.24) v1(40.64,27.69) v1(41.27,8.64) v1(41.78,64.01) v1(42.42,50.42) v1(42.64,56.36) v1(42.89,55.22) v1(43.31,43.43) v1(43.31,41.66) v1(43.78,55.98) v1(43.78,54.58) v1(43.81,48.64) v1(43.81,45.59) v1(44.2,42.55) v1(44.2,41.66) v1(44.2,40.77) v1(45.09,43.43) v1(45.09,41.66) v1(45.09,39.88) v1(45.21,33.4) v1(45.21,14.73) v1(45.56,64.11) v1(46.06,60.93) v1(46.35,47.75) v1(47.37,18.54) v1(47.37,17.53) v1(47.75,16.64) v1(48.13,46.61) v1(48.51,44.2) v1(48.77,16.64) v1(49.24,60.81) v1(49.37,63.98) v1(49.66,38.48) v1(49.78,44.2) v1(50.04,16.64) v1(50.16,8.51) v1(50.42,14.35) v1(51.05,44.2) v1(51.05,18.41) v1(51.05,17.53) v1(51.05,16.64) v1(51.18,10.29) v1(51.18,9.4) v1(51.18,8.51) v1(51.94,17.53) v1(51.94,16.64) v1(52.03,55.98) v1(52.07,9.4) v1(52.07,8.51) v1(52.29,54.58) v1(52.29,53.7) v1(52.32,25.78) v1(52.32,18.41) v1(52.45,29.97) v1(52.45,10.29) v1(52.83,17.53) v1(52.83,16.64) v1(52.96,9.4) v1(52.96,8.51) v1(53.3,55.98) v1(53.3,54.58) v1(53.3,53.7) v1(53.72,39.5) v1(54.23,43.94) v1(56.13,14.35) v1(56.52,55.75) v1(57.02,20.83) v1(57.02,19.05) v1(57.02,12.7) v1(57.02,10.92) v1(57.91,19.94) v1(57.91,19.05) v1(57.91,18.16) v1(57.91,11.81) v1(57.91,10.92) v1(57.91,10.03) v1(58.8,20.83) v1(58.8,19.05) v1(58.8,12.7) v1(58.8,10.92) v1(58.8,9.14) v1(58.8,5.84) v1(59.44,41.66) v1(60.07,45.85) v1(60.2,25.15) v1(60.33,28.07) v1(60.45,51.94) v1(60.45,7.62) v1(61.34,14.35) v1(61.98,22.35) v1(61.98,21.84) v1(62.23,14.35) v1(62.23,13.46) v1(63.37,22.35) v1(63.37,21.72) v1(63.5,41.53) v1(63.5,14.35) v1(63.5,13.46) v1(64.01,25.53) v1(64.77,22.35) v1(64.77,21.59) v1(64.77,14.35) v1(64.77,13.46) v1(64.77,4.32) v1(64.77,1.14) v1(65.28,8.26) v1(66.17,10.54) v1(66.55,13.59) v1(66.67,20.32) v1(66.67,16.64) v1(67.18,52.58) v1(67.18,51.44) v1(67.18,1.27) v1(67.56,6.6) v1(67.94,57.4) v1(68.58,51.44) v1(68.71,52.58) v1(68.96,17.65) v1(70.1,52.45) v1(70.1,51.44) v1(70.36,23.62) v1(70.36,9.53) v1(71.88,52.45) v1(73.53,42.04) v1(73.53,23.62) v1(73.66,54.99) v1(73.66,29.21) v1(73.79,51.82) v1(73.79,48.26) v1(73.79,8) v1(73.91,45.47)
